# EAGLE board Sequencer-Logic-Prod-V2.1 (EAGLE 9.6.2), part 1 of 2
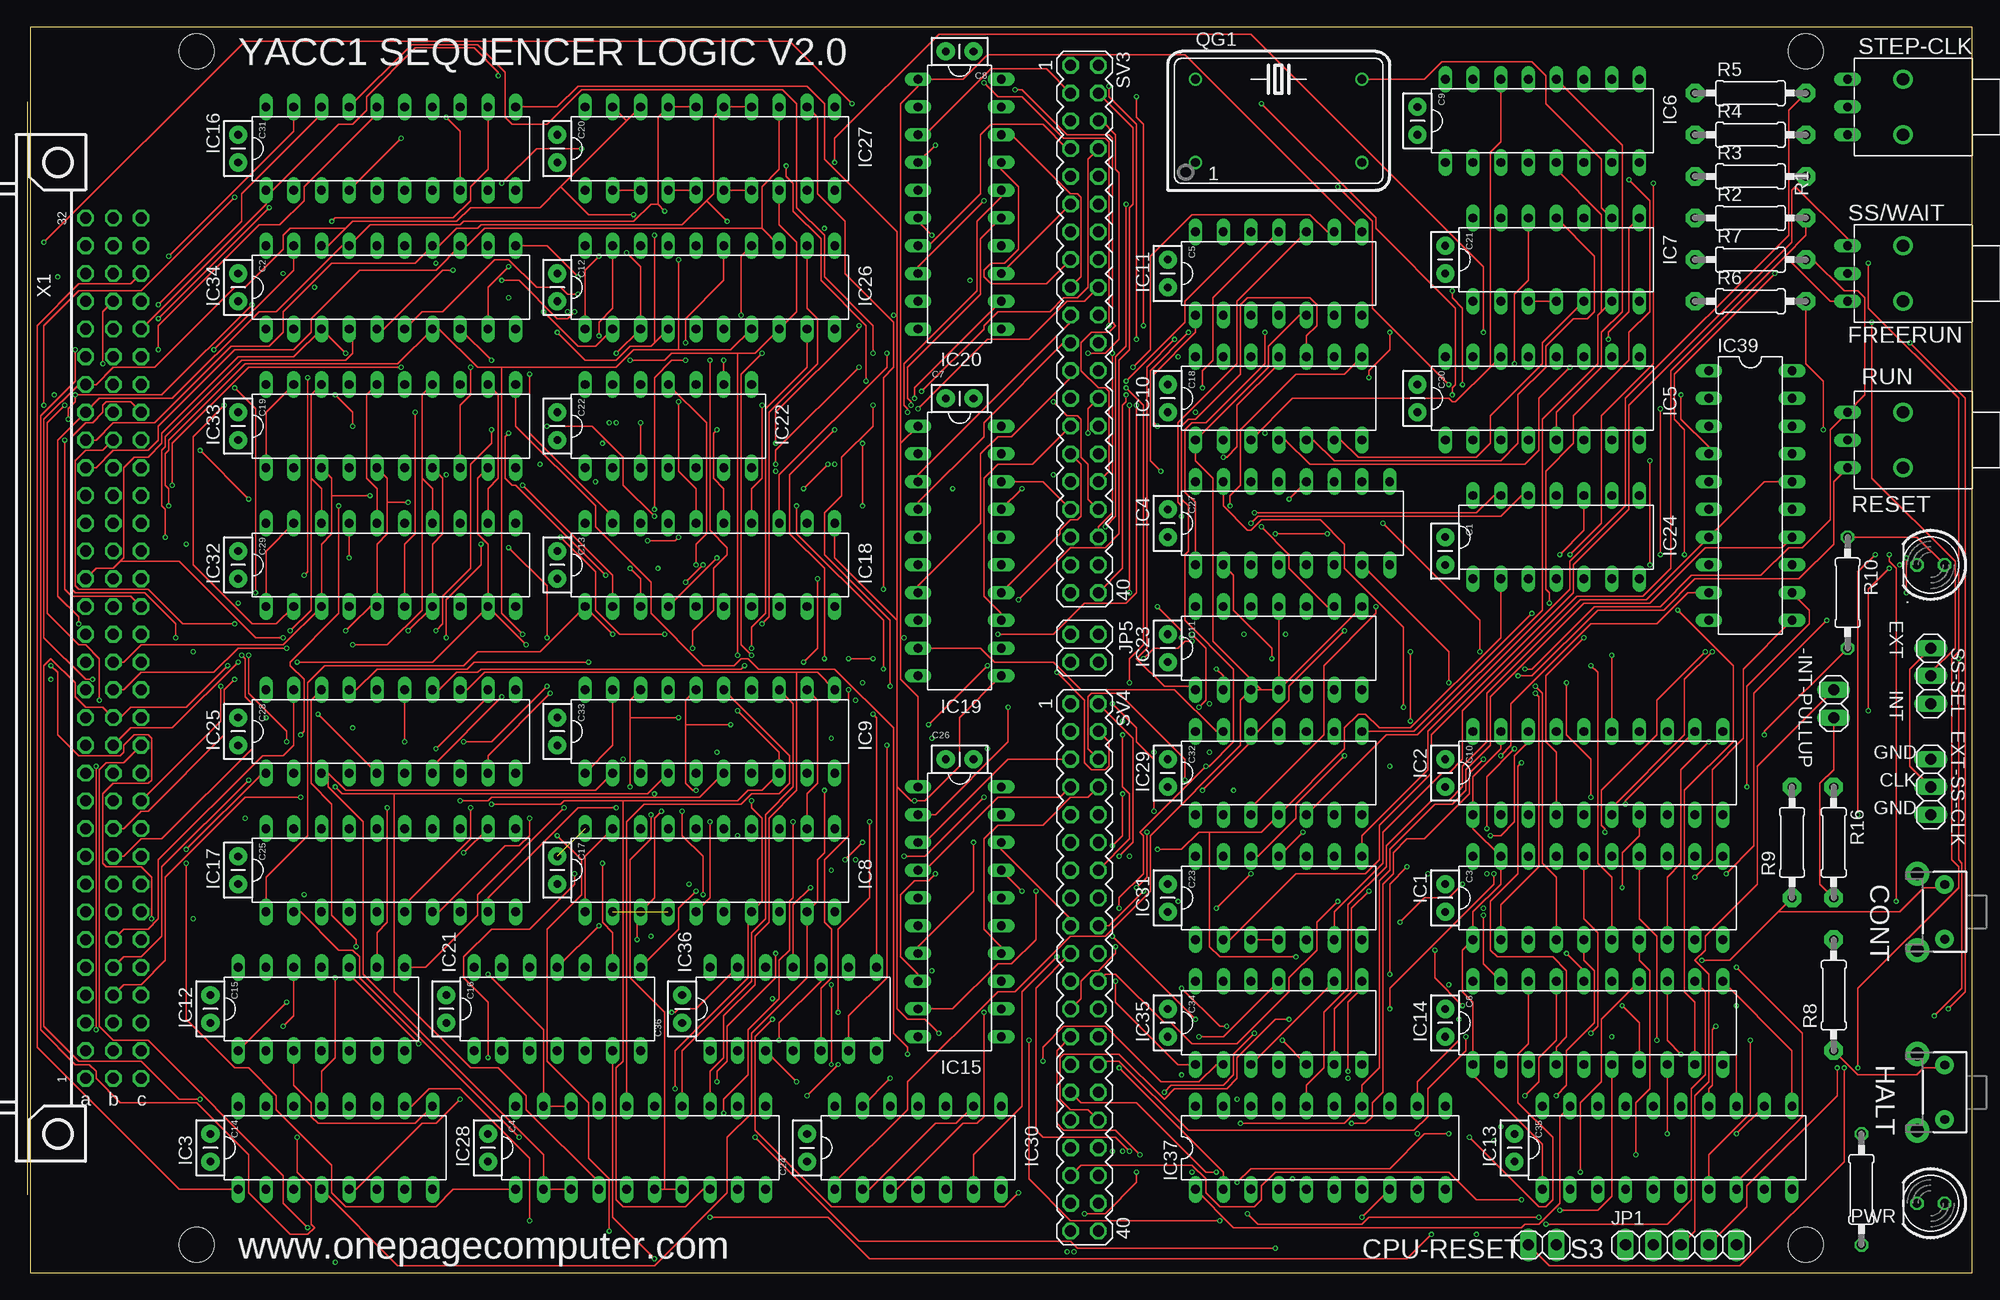
[diagram p0: board, top side]
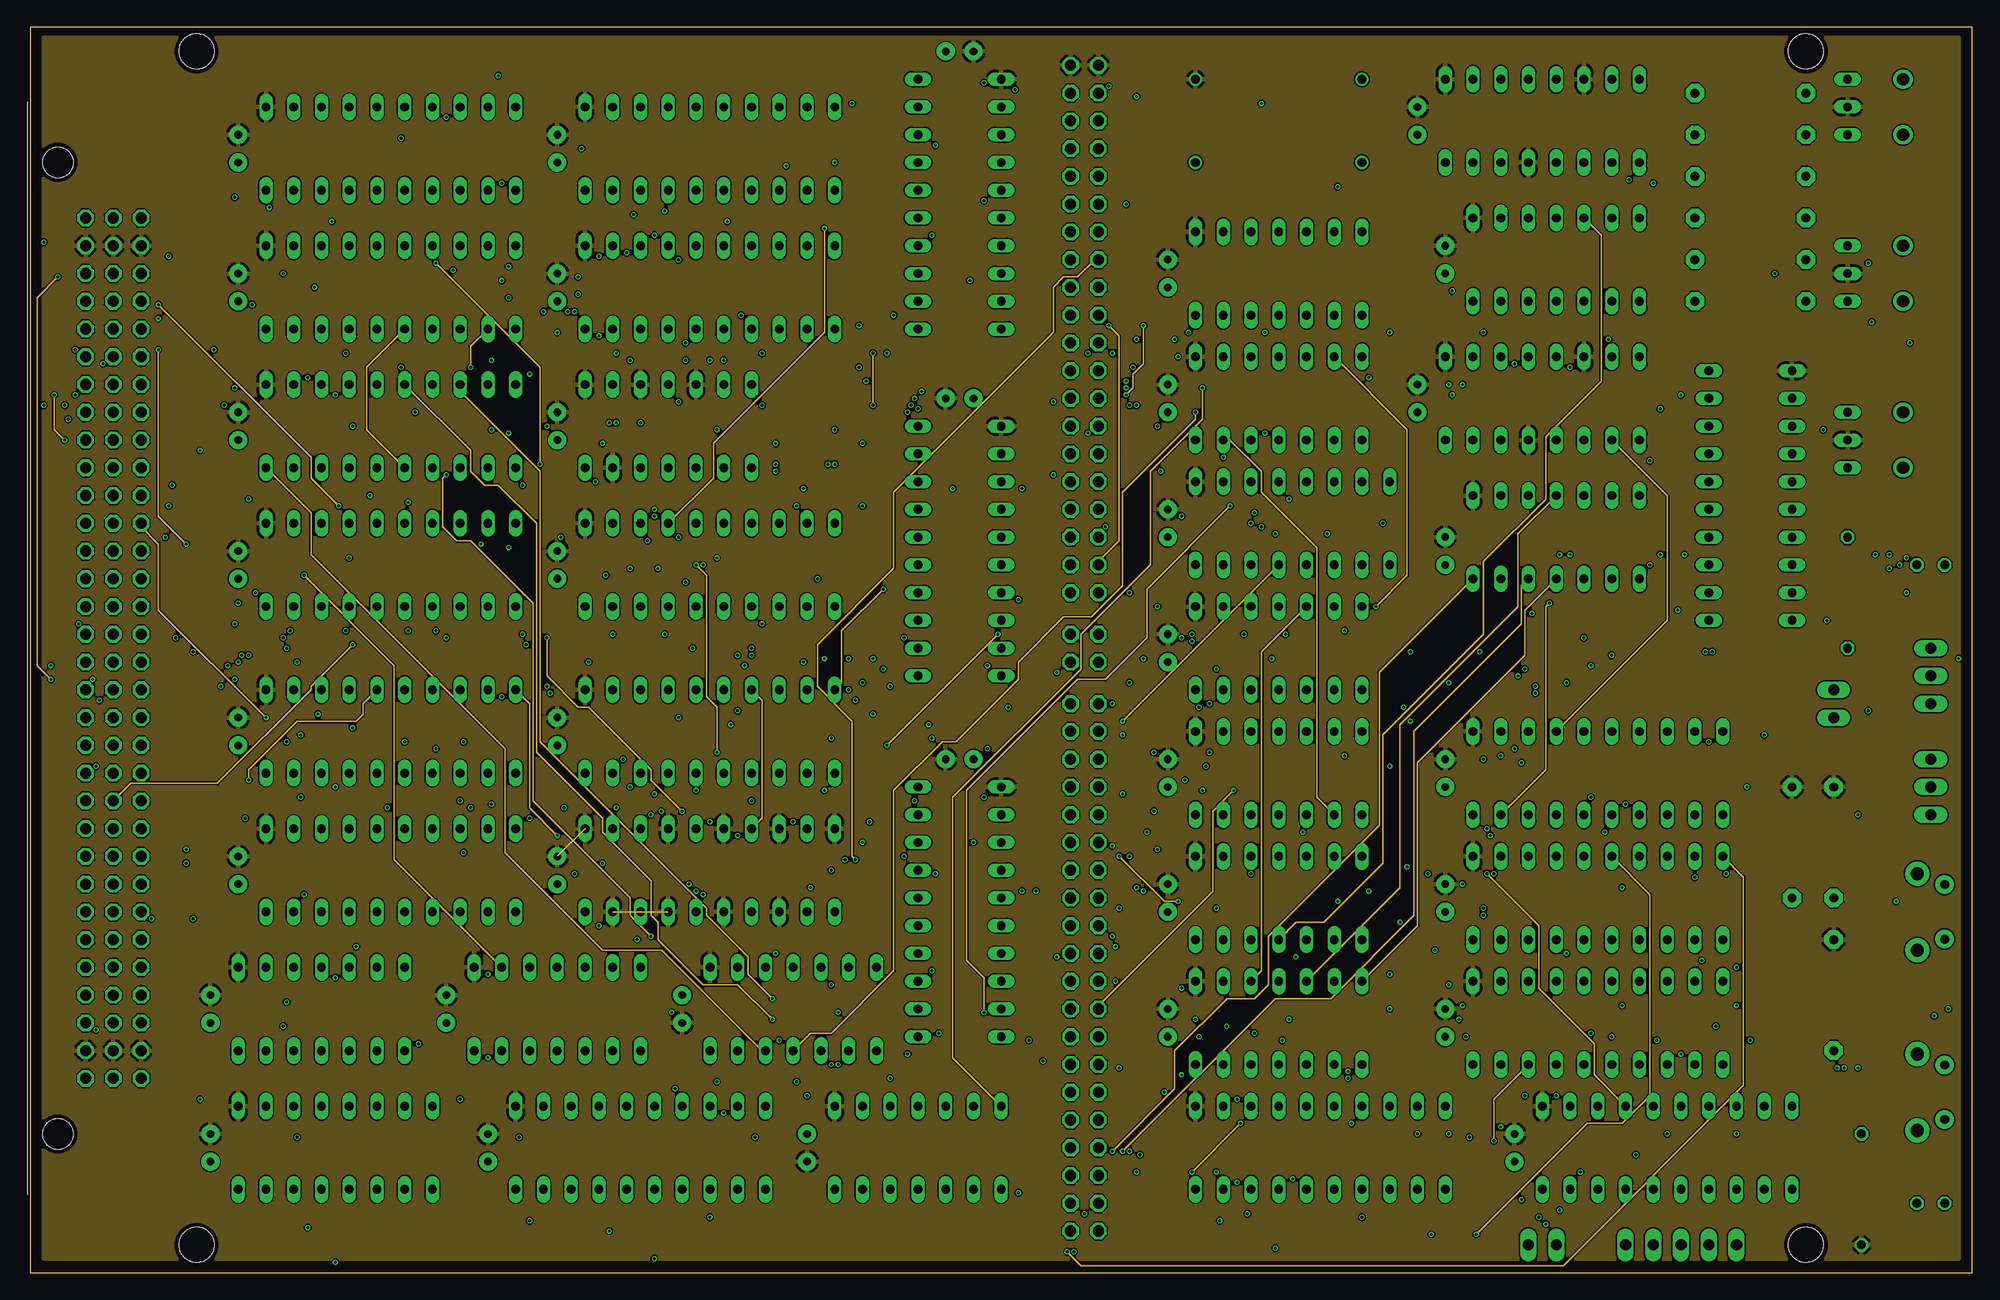
[diagram p1: board, inner layer Route2]
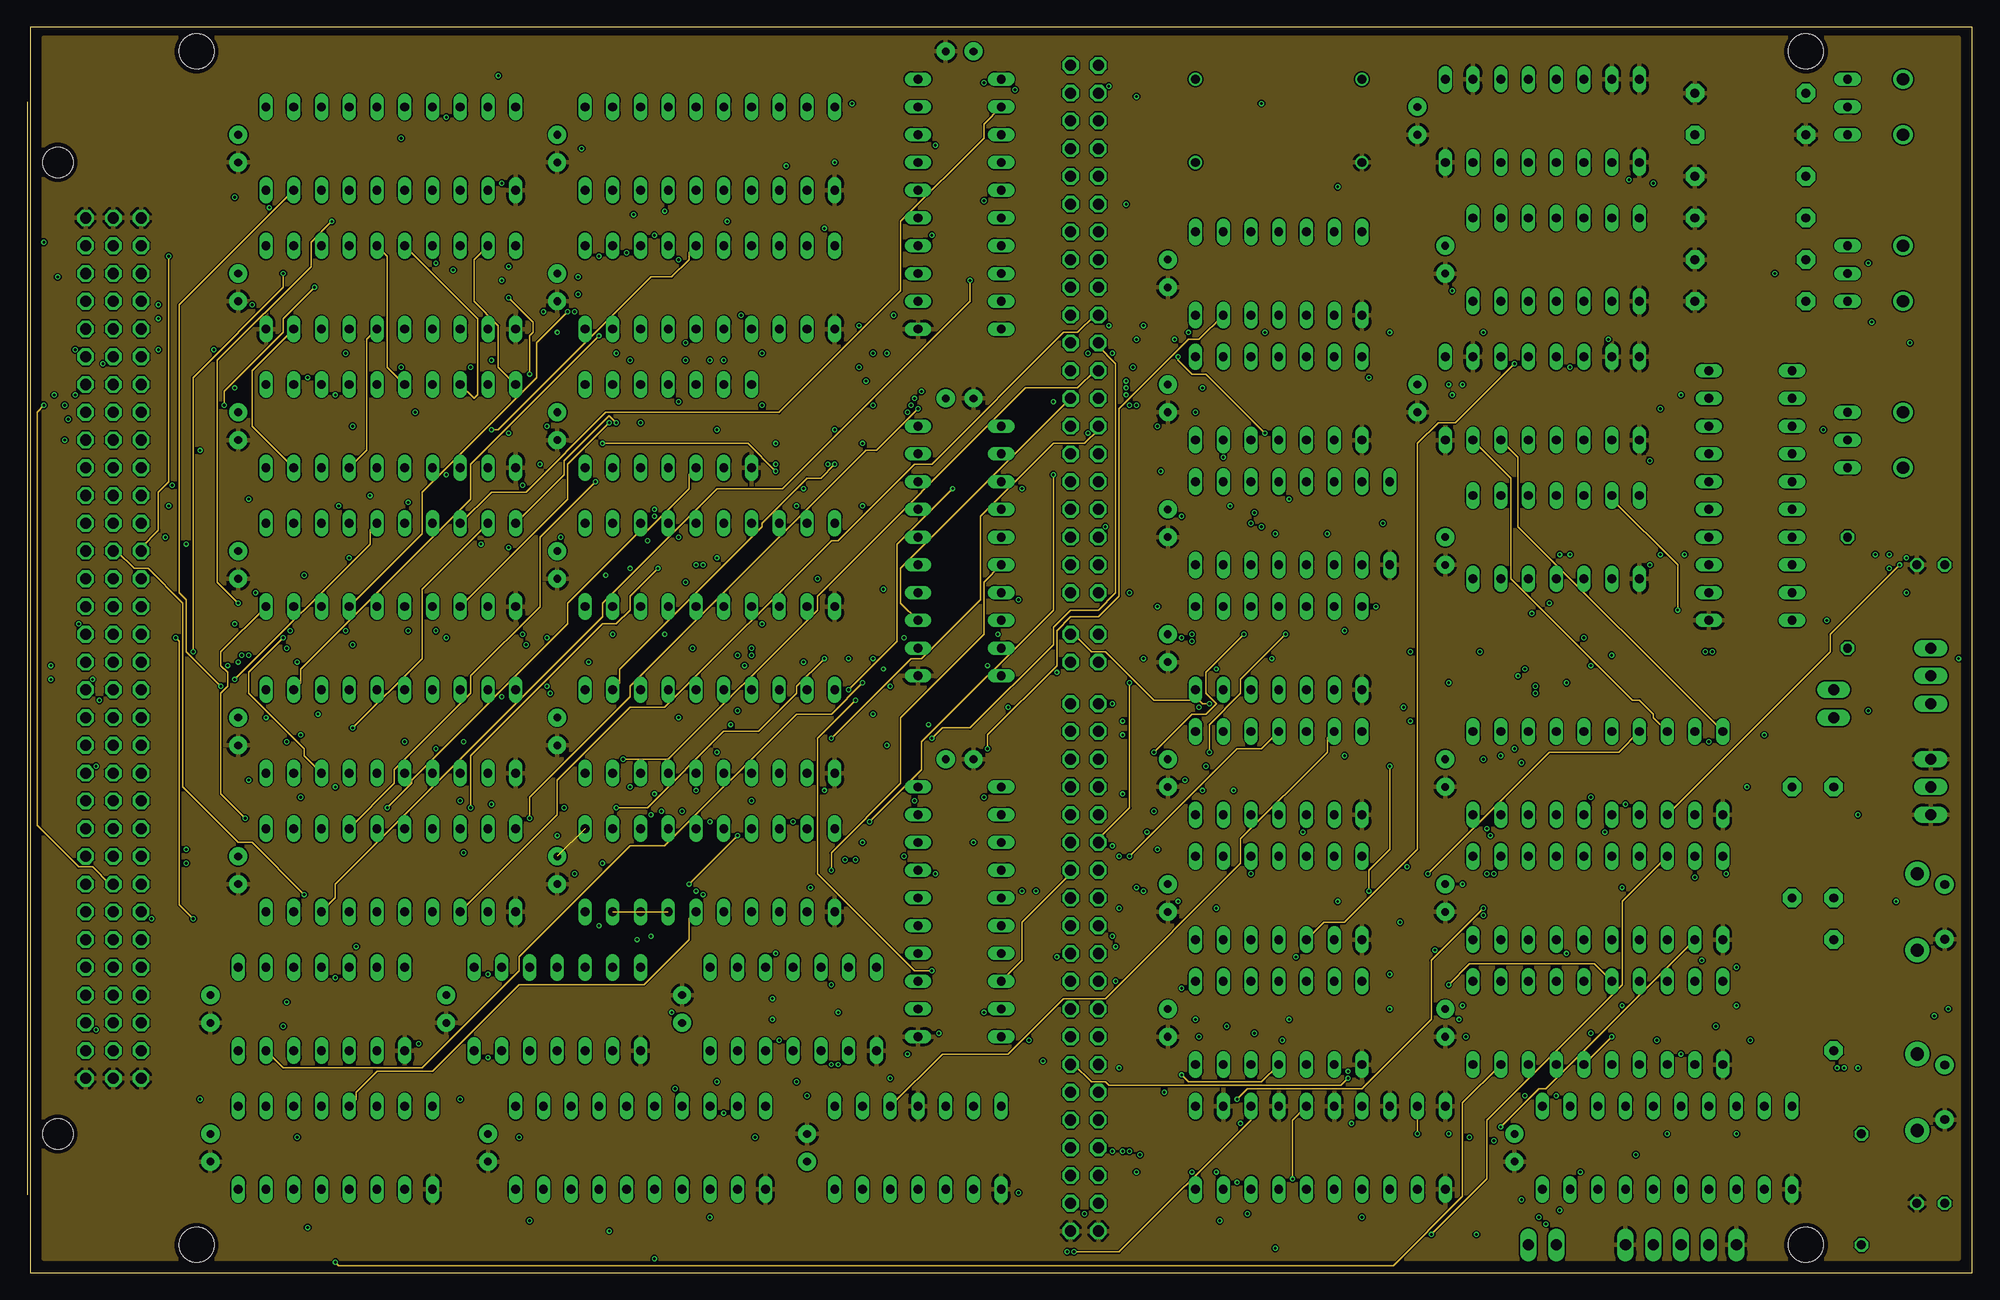
[diagram p2: board, inner layer Route15]
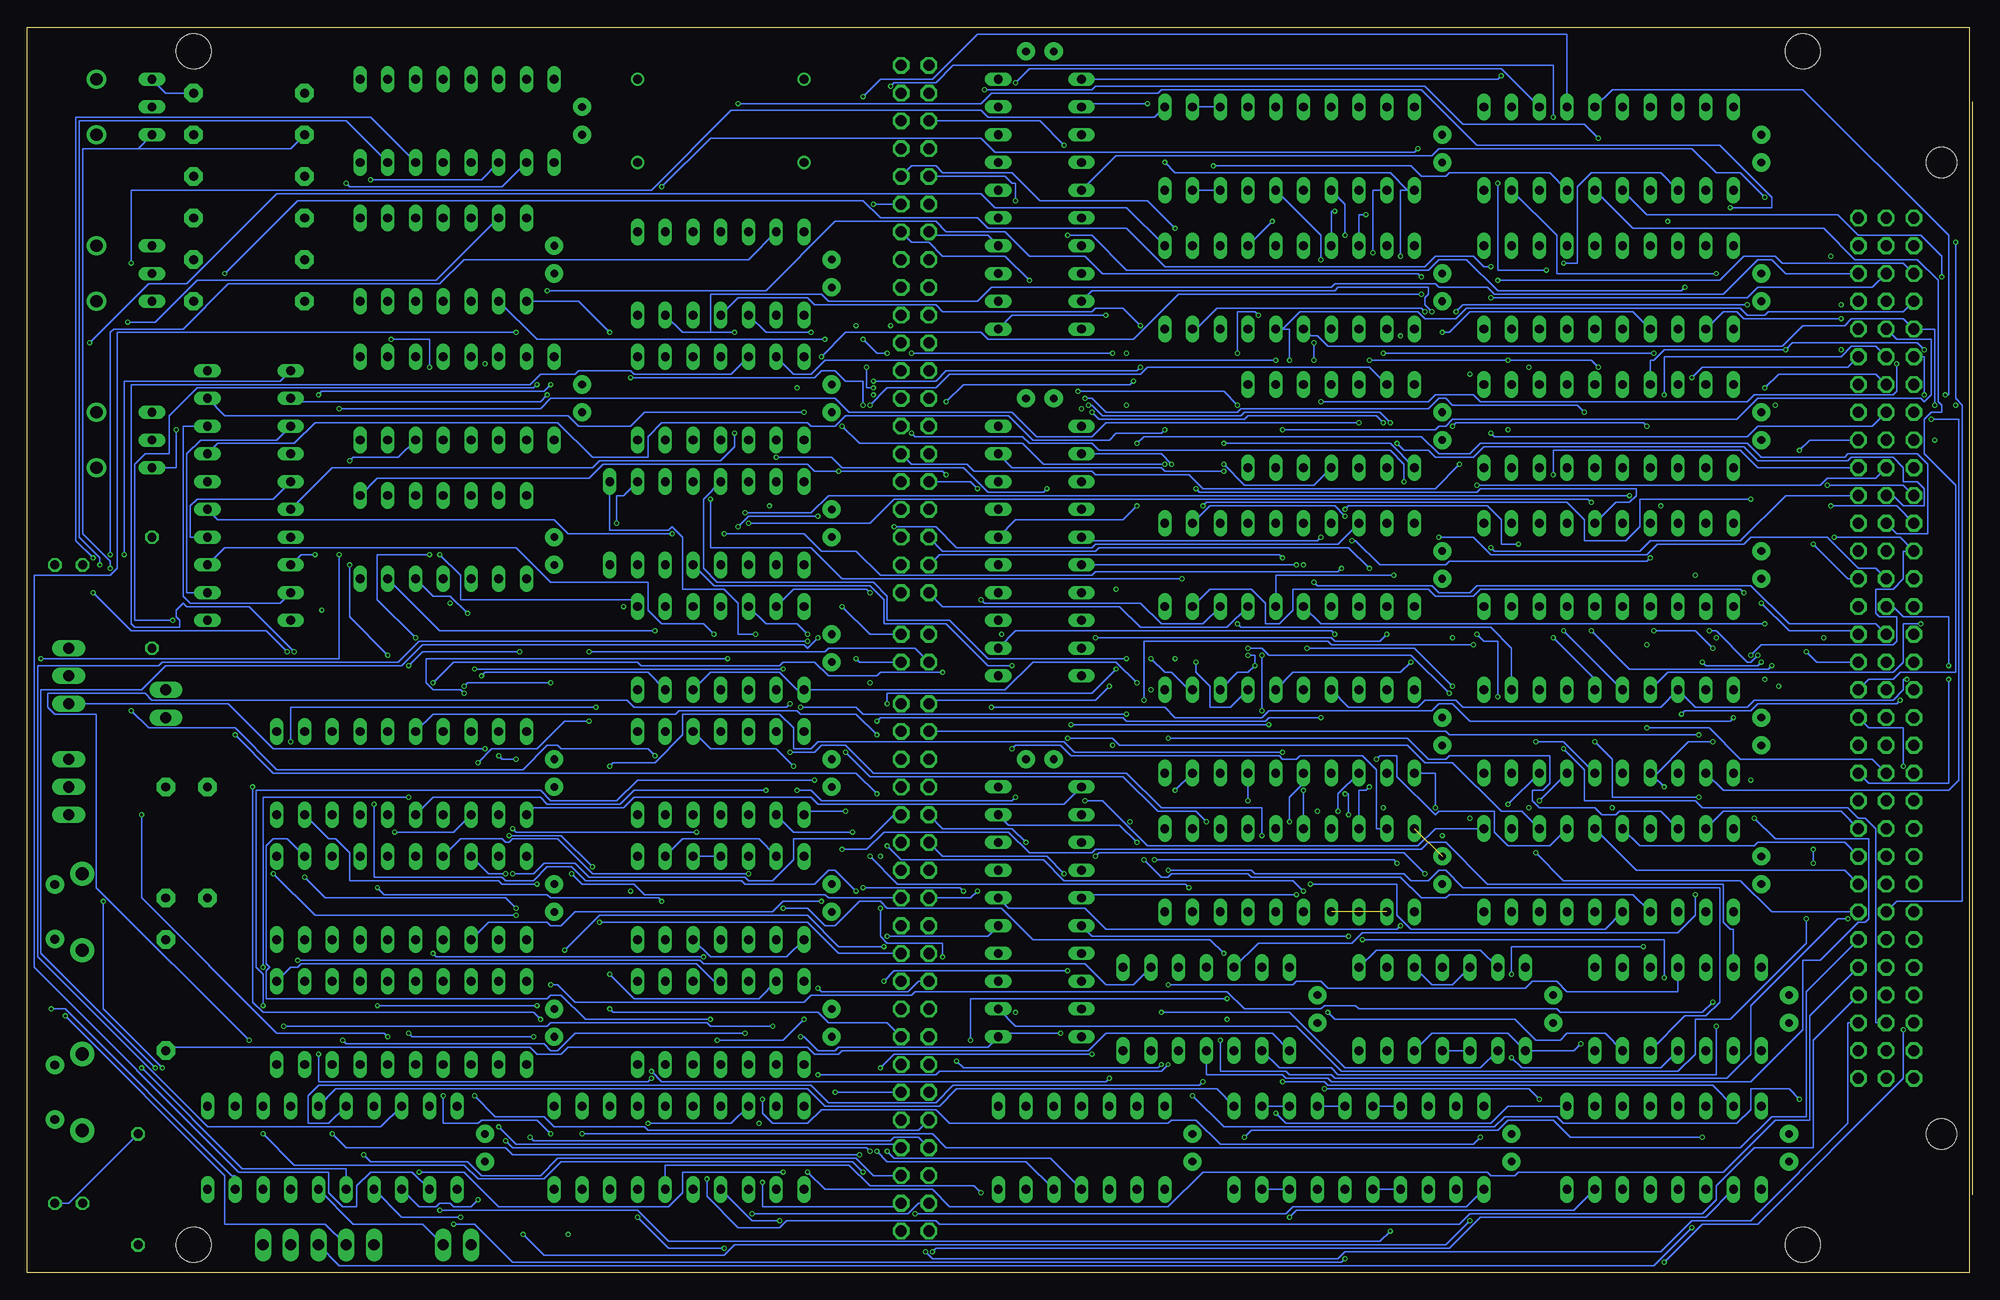
[diagram p3: board, bottom side, seen from below]

Size 177.78 x 113.97 mm. Coordinates in mm from the lower left corner, seen from the top.
Outline: 0,0 177.78,0 177.78,113.97 0,113.97 0,0
Copper layers (1*2*15*16): Top 0.035559375mm / dielectric 0.17018125mm / Route2 0.01778125mm / dielectric 47mil / Route15 0.01778125mm / dielectric 0.17018125mm / Bottom 0.035559375mm
Design rules "oshpark-4layer *": minimum track width 5mil, minimum drill 10mil, track to track 5mil, track to pad 5mil, pad to pad 5mil, via to via 5mil, smd to smd 5mil, copper to edge 15mil, drill to drill 6mil, minimum pad ring 4mil, minimum via ring 4mil, stop-mask expansion 2.5mil, vias tented up to drill 0mil, thermal gap 10mil
Holes 3.2 mm at 15.24,111.76 15.24,2.54 162.56,2.54 162.56,111.76

## Footprints (pad centres in the part's own frame; a part is rotated, then mirrored left to right if it is on the bottom)
1X02 = drill 1.016 long: 1 -1.27,0; 2 1.27,0
LED5MM = drill 0.813 octagon: A -1.27,0; K 1.27,0
CAP-PTH-SMALLEZ = drill 0.7 pad 1.651: 1 0,0; 2 2.54,0
TACTILE-PTH-SIDEEZ = drill 0.8 pad 1.7: 1 -2.5,0; 2 2.5,0 | drill 1.2 pad 2.2: ANCHOR1 -3.5,2.5; ANCHOR2 3.5,2.5
1X03 = drill 1.016 long: 1 -2.54,0; 2 0,0; 3 2.54,0
DIL20 = drill 0.813 long: 1 -11.43,-3.81; 2 -8.89,-3.81; 3 -6.35,-3.81; 4 -3.81,-3.81; 5 -1.27,-3.81; 6 1.27,-3.81; 7 3.81,-3.81; 8 6.35,-3.81; 9 8.89,-3.81; 10 11.43,-3.81; 11 11.43,3.81; 12 8.89,3.81; 13 6.35,3.81; 14 3.81,3.81; 15 1.27,3.81; 16 -1.27,3.81; 17 -3.81,3.81; 18 -6.35,3.81; 19 -8.89,3.81; 20 -11.43,3.81
DIL16 = drill 0.813 long: 1 -8.89,-3.81; 2 -6.35,-3.81; 3 -3.81,-3.81; 4 -1.27,-3.81; 5 1.27,-3.81; 6 3.81,-3.81; 7 6.35,-3.81; 8 8.89,-3.81; 9 8.89,3.81; 10 6.35,3.81; 11 3.81,3.81; 12 1.27,3.81; 13 -1.27,3.81; 14 -3.81,3.81; 15 -6.35,3.81; 16 -8.89,3.81
DIL14 = drill 0.813 long: 1 -7.62,-3.81; 2 -5.08,-3.81; 3 -2.54,-3.81; 4 0,-3.81; 5 2.54,-3.81; 6 5.08,-3.81; 7 7.62,-3.81; 8 7.62,3.81; 9 5.08,3.81; 10 2.54,3.81; 11 0,3.81; 12 -2.54,3.81; 13 -5.08,3.81; 14 -7.62,3.81
1X05 = drill 1.016 long: 1 -5.08,0; 2 -2.54,0; 3 0,0; 4 2.54,0; 5 5.08,0
2X02 = drill 1.016 octagon: 1 -1.27,-1.27; 2 -1.27,1.27; 3 1.27,-1.27; 4 1.27,1.27
DIL14S = drill 0.813: 1 -7.62,-3.81; 7 7.62,-3.81; 8 7.62,3.81; 14 -7.62,3.81
0207/10 = drill 0.813 octagon: 1 -5.08,0; 2 5.08,0
0207/10' = drill 0.813 pad 1.676 octagon: 1 -5.08,0; 2 5.08,0
9070-1W = drill 0.813 long: 1 5.08,-2.54; 2 5.08,0; 3 5.08,2.54 | drill 1.118 pad 1.778: B 0,-2.54; B1 0,2.54
MA20-2 = drill 1.016 octagon: 1 -24.13,-1.27; 2 -24.13,1.27; 3 -21.59,-1.27; 4 -21.59,1.27; 5 -19.05,-1.27; 6 -19.05,1.27; 7 -16.51,-1.27; 8 -16.51,1.27; 9 -13.97,-1.27; 10 -13.97,1.27; 11 -11.43,-1.27; 12 -11.43,1.27; 13 -8.89,-1.27; 14 -8.89,1.27; 15 -6.35,-1.27; 16 -6.35,1.27; 17 -3.81,-1.27; 18 -3.81,1.27; 19 -1.27,-1.27; 20 -1.27,1.27; 21 1.27,-1.27; 22 1.27,1.27; 23 3.81,-1.27; 24 3.81,1.27; 25 6.35,-1.27; 26 6.35,1.27; 27 8.89,-1.27; 28 8.89,1.27; 29 11.43,-1.27; 30 11.43,1.27; 31 13.97,-1.27; 32 13.97,1.27; 33 16.51,-1.27; 34 16.51,1.27; 35 19.05,-1.27; 36 19.05,1.27; 37 21.59,-1.27; 38 21.59,1.27; 39 24.13,-1.27; 40 24.13,1.27
FABC96R = drill 1.016 octagon: A1 -2.54,39.37; A2 -2.54,36.83; A3 -2.54,34.29; A4 -2.54,31.75; A5 -2.54,29.21; A6 -2.54,26.67; A7 -2.54,24.13; A8 -2.54,21.59; A9 -2.54,19.05; A10 -2.54,16.51; A11 -2.54,13.97; A12 -2.54,11.43; A13 -2.54,8.89; A14 -2.54,6.35; A15 -2.54,3.81; A16 -2.54,1.27; A17 -2.54,-1.27; A18 -2.54,-3.81; A19 -2.54,-6.35; A20 -2.54,-8.89; A21 -2.54,-11.43; A22 -2.54,-13.97; A23 -2.54,-16.51; A24 -2.54,-19.05; A25 -2.54,-21.59; A26 -2.54,-24.13; A27 -2.54,-26.67; A28 -2.54,-29.21; A29 -2.54,-31.75; A30 -2.54,-34.29; A31 -2.54,-36.83; A32 -2.54,-39.37; B1 -5.08,39.37; B2 -5.08,36.83; B3 -5.08,34.29; B4 -5.08,31.75; B5 -5.08,29.21; B6 -5.08,26.67; B7 -5.08,24.13; B8 -5.08,21.59; B9 -5.08,19.05; B10 -5.08,16.51; B11 -5.08,13.97; B12 -5.08,11.43; B13 -5.08,8.89; B14 -5.08,6.35; B15 -5.08,3.81; B16 -5.08,1.27; B17 -5.08,-1.27; B18 -5.08,-3.81; B19 -5.08,-6.35; B20 -5.08,-8.89; B21 -5.08,-11.43; B22 -5.08,-13.97; B23 -5.08,-16.51; B24 -5.08,-19.05; B25 -5.08,-21.59; B26 -5.08,-24.13; B27 -5.08,-26.67; B28 -5.08,-29.21; B29 -5.08,-31.75; B30 -5.08,-34.29; B31 -5.08,-36.83; B32 -5.08,-39.37; C1 -7.62,39.37; C2 -7.62,36.83; C3 -7.62,34.29; C4 -7.62,31.75; C5 -7.62,29.21; C6 -7.62,26.67; C7 -7.62,24.13; C8 -7.62,21.59; C9 -7.62,19.05; C10 -7.62,16.51; C11 -7.62,13.97; C12 -7.62,11.43; C13 -7.62,8.89; C14 -7.62,6.35; C15 -7.62,3.81; C16 -7.62,1.27; C17 -7.62,-1.27; C18 -7.62,-3.81; C19 -7.62,-6.35; C20 -7.62,-8.89; C21 -7.62,-11.43; C22 -7.62,-13.97; C23 -7.62,-16.51; C24 -7.62,-19.05; C25 -7.62,-21.59; C26 -7.62,-24.13; C27 -7.62,-26.67; C28 -7.62,-29.21; C29 -7.62,-31.75; C30 -7.62,-34.29; C31 -7.62,-36.83; C32 -7.62,-39.37 | hole 2.794: 0,-44.456; 0,44.456

## Placement (x,y rotation side)
-INT-PULLUP  [1X02]  165.1,52.07 90 top
.  OUT  [LED5MM]  173.99,64.77 180 top
C1  .1  [CAP-PTH-SMALLEZ]  129.54,67.31 270 top
C2  .1  [CAP-PTH-SMALLEZ]  19.05,91.44 270 top
C3  .1  [CAP-PTH-SMALLEZ]  129.54,35.56 270 top
C4  .1  [CAP-PTH-SMALLEZ]  41.91,12.7 270 top
C5  .1  [CAP-PTH-SMALLEZ]  104.14,92.71 270 top
C6  .1  [CAP-PTH-SMALLEZ]  129.54,24.13 270 top
C7  .1  [CAP-PTH-SMALLEZ]  83.82,80.01 0 top
C8  .1  [CAP-PTH-SMALLEZ]  86.36,111.76 180 top
C9  .1  [CAP-PTH-SMALLEZ]  127,106.68 270 top
C10  .1  [CAP-PTH-SMALLEZ]  129.54,46.99 270 top
C11  .1  [CAP-PTH-SMALLEZ]  104.14,58.42 270 top
C12  .1  [CAP-PTH-SMALLEZ]  48.26,91.44 270 top
C13  .1  [CAP-PTH-SMALLEZ]  48.26,66.04 270 top
C14  .1  [CAP-PTH-SMALLEZ]  16.51,12.7 270 top
C15  .1  [CAP-PTH-SMALLEZ]  16.51,25.4 270 top
C16  .1  [CAP-PTH-SMALLEZ]  38.1,25.4 270 top
C17  .1  [CAP-PTH-SMALLEZ]  48.26,38.1 270 top
C18  .1  [CAP-PTH-SMALLEZ]  104.14,81.28 270 top
C19  .1  [CAP-PTH-SMALLEZ]  19.05,78.74 270 top
C20  .1  [CAP-PTH-SMALLEZ]  48.26,104.14 270 top
C21  .1  [CAP-PTH-SMALLEZ]  129.54,93.98 270 top
C22  .1  [CAP-PTH-SMALLEZ]  48.26,78.74 270 top
C23  .1  [CAP-PTH-SMALLEZ]  104.14,35.56 270 top
C24  .1  [CAP-PTH-SMALLEZ]  71.12,10.16 90 top
C25  .1  [CAP-PTH-SMALLEZ]  19.05,38.1 270 top
C26  .1  [CAP-PTH-SMALLEZ]  83.82,46.99 0 top
C27  .1  [CAP-PTH-SMALLEZ]  104.14,69.85 270 top
C28  .1  [CAP-PTH-SMALLEZ]  19.05,50.8 270 top
C29  .1  [CAP-PTH-SMALLEZ]  19.05,66.04 270 top
C30  .1  [CAP-PTH-SMALLEZ]  127,81.28 270 top
C31  .1  [CAP-PTH-SMALLEZ]  19.05,104.14 270 top
C32  .1  [CAP-PTH-SMALLEZ]  104.14,46.99 270 top
C33  .1  [CAP-PTH-SMALLEZ]  48.26,50.8 270 top
C34  .1  [CAP-PTH-SMALLEZ]  104.14,24.13 270 top
C35  .1  [CAP-PTH-SMALLEZ]  135.89,12.7 270 top
C36  .1  [CAP-PTH-SMALLEZ]  59.69,22.86 90 top
CONT  SWITCH-MOMENTARY-2SIDE_EZ  [TACTILE-PTH-SIDEEZ]  175.26,33.02 90 top
EXT-SS-CLK  [1X03]  173.99,44.45 270 top
HALT  SWITCH-MOMENTARY-2SIDE_EZ  [TACTILE-PTH-SIDEEZ]  175.26,16.51 90 top
IC1  74LS244N  [DIL20]  143.51,34.29 0 top
IC2  74LS244N  [DIL20]  143.51,45.72 0 top
IC3  74LS175N  [DIL16]  27.94,11.43 0 top
IC4  74LS175N  [DIL16]  115.57,68.58 0 top
IC5  74LS192N  [DIL16]  138.43,80.01 0 top
IC6  74LS192N  [DIL16]  138.43,105.41 0 top
IC7  74LS08N  [DIL14]  139.7,92.71 0 top
IC8  74LS244N  [DIL20]  62.23,36.83 0 top
IC9  74LS244N  [DIL20]  62.23,49.53 0 top
IC10  74LS32N  [DIL14]  114.3,80.01 0 top
IC11  74LS04N  [DIL14]  114.3,91.44 0 top
IC12  74LS08N  [DIL14]  26.67,24.13 0 top
IC13  74LS374N  [DIL20]  149.86,11.43 0 top
IC14  74LS374N  [DIL20]  143.51,22.86 0 top
IC15  74LS374N  [DIL20]  85.09,33.02 270 top
IC16  74LS374N  [DIL20]  33.02,102.87 0 top
IC17  74LS374N  [DIL20]  33.02,36.83 0 top
IC18  74LS374N  [DIL20]  62.23,64.77 0 top
IC19  74LS374N  [DIL20]  85.09,66.04 270 top
IC20  74LS374N  [DIL20]  85.09,97.79 270 top
IC21  74ALS02N  [DIL14]  48.26,24.13 0 top
IC22  74LS74N  [DIL14]  58.42,77.47 0 top
IC23  74ALS02N  [DIL14]  114.3,57.15 0 top
IC24  74LS32N  [DIL14]  139.7,67.31 0 top
IC25  74LS374N  [DIL20]  33.02,49.53 0 top
IC26  74LS374N  [DIL20]  62.23,90.17 0 top
IC27  74LS374N  [DIL20]  62.23,102.87 0 top
IC28  74LS374N  [DIL20]  55.88,11.43 0 top
IC29  74LS08N  [DIL14]  114.3,45.72 0 top
IC30  74LS04N  [DIL14]  81.28,11.43 0 top
IC31  74ALS02N  [DIL14]  114.3,34.29 0 top
IC32  74LS244N  [DIL20]  33.02,64.77 0 top
IC33  74LS244N  [DIL20]  33.02,77.47 0 top
IC34  74LS374N  [DIL20]  33.02,90.17 0 top
IC35  74LS32N  [DIL14]  114.3,22.86 0 top
IC36  74LS04N  [DIL14]  69.85,24.13 0 top
IC37  74LS244N  [DIL20]  118.11,11.43 0 top
IC39  74LS244N  [DIL20]  157.48,71.12 270 top
JP1  [1X05]  151.13,2.54 0 top
JP2  PINHD-1X2  [1X02]  138.43,2.54 0 top
JP5  [2X02]  96.52,57.15 270 top
PWR  [LED5MM]  173.99,6.35 180 top
QG1  [DIL14S]  114.3,105.41 0 top
R1  330  [0207/10]  167.64,7.62 270 top
R2  10k  [0207/10']  157.48,96.52 180 top
R3  10k  [0207/10']  157.48,100.33 0 top
R4  10k  [0207/10']  157.48,104.14 0 top
R5  10k  [0207/10']  157.48,107.95 0 top
R6  10k  [0207/10']  157.48,88.9 180 top
R7  10k  [0207/10']  157.48,92.71 0 top
R8  10k  [0207/10']  165.1,25.4 90 top
R9  10k  [0207/10']  161.29,39.37 90 top
R10  330  [0207/10]  166.37,62.23 270 top
R16  10k  [0207/10']  165.1,39.37 270 top
RESET  [9070-1W]  171.45,76.2 180 top
SS-SEL  [1X03]  173.99,54.61 90 top
SS/WAIT  [9070-1W]  171.45,91.44 180 top
STEP-CLK  [9070-1W]  171.45,106.68 180 top
SV3  [MA20-2]  96.52,86.36 270 top
SV4  [MA20-2]  96.52,27.94 270 top
X1  FABC96R  [FABC96R]  2.54,57.15 180 top

## Library data of the parts
-INT-PULLUP EXT-SS-CLK JP1 JP5 SS-SEL = pinhead
. PWR = led
C1-C36 = SparkFun-Capacitors
CONT HALT = SparkFun-Electromechanical
IC1-IC37 IC39 = 74xx-us
JP2 = Connector; CATEGORY: CONNECTOR; SUB-CATEGORY: PIN-HEADER
QG1 = crystal; OC_FARNELL: unknown; OC_NEWARK: unknown
R1 R10 = eagle-ltspice; SPICEMODEL: NONE; SPICEPREFIX: R
R2-R9 R16 = adafruit
RESET SS/WAIT STEP-CLK = switch
SV3 SV4 = con-lstb; OC_FARNELL: unknown; OC_NEWARK: unknown
X1 = con-vg

## Nets
-2-BYTE-OPERAND-SEL: IC13.16 IC33.1 IC33.19 IC36.3
-AC-LD: IC15.5 X1.C22
-AC-LD-INV: IC16.19 X1.C20
-AC-RD: IC15.2 X1.C21
-ALU-FUNC: IC16.6 X1.C15
-BRANCH-RD: IC13.2 IC26.1 IC27.1
-BUS-EN: IC1.1 IC1.19 IC2.1 IC2.19 IC11.8 IC13.1 IC14.1 IC15.1 IC16.1 IC17.1 IC18.1 IC19.1 IC20.1 X1.C28
-DO-INT: IC8.1 IC8.19 IC11.2
-FP-HALT: HALT.2 IC36.1 R8.1
-HALT-CONT: CONT.2 IC36.9 R9.1
-HL-SWAP: IC15.12 X1.C25
-INT: -INT-PULLUP.2 JP1.3 X1.C13
-INT-JMP: IC13.12 IC25.1 IC28.1
-INTA: IC14.2 X1.C14
-IO-ADDR-LD: IC16.2 X1.C11
-IO-RD: IC18.6 X1.B25
-IO-WR: IC18.9 X1.B26
-MEM-CPU-RESET: JP2.1 JP5.2
-MEM-RD: IC18.2 X1.B23
-MEM-WR: IC18.5 X1.B24
-ONE-OPERAND-SEL: IC32.1 IC32.19 IC36.4 IC39.19
-REG-DN: IC19.16 X1.B21
-REG-FUNC-LD: IC20.5 X1.B8
-REG-FUNC-RD: IC20.2 X1.B7
-REG-LD-HI: IC36.12 X1.B20
-REG-LD-LO: IC36.10 X1.B18
-REG-RD-HI: IC19.12 X1.B19
-REG-RD-LO: IC19.6 X1.B17
-REG-UP: IC19.19 X1.B22
-RESET: IC3.1 IC4.1 IC11.6 X1.C30
-RUN: X1.C29
-SR-LD: IC15.6 X1.C23
-TMP-REG-LD0: IC18.15 X1.B28
-TMP-REG-LD1: IC18.19 X1.B30
-TMP-REG-RD0: IC18.12 X1.B27
-TMP-REG-RD1: IC18.16 X1.B29
-VMA: IC16.5 X1.C12
ADDR0: X1.A3
ADDR1: X1.A4
ADDR2: X1.A5
ADDR3: X1.A6
ADDR4: X1.A7
ADDR5: X1.A8
ADDR6: X1.A9
ADDR7: X1.A10
ADDR8: X1.A11
ADDR9: X1.A12
ADDR10: X1.A13
ADDR11: X1.A14
ADDR12: X1.A15
ADDR13: X1.A16
ADDR14: X1.A17
ADDR15: X1.A18
ADDR-REG-ID0: IC37.18 IC39.9 IC39.18 X1.C3
ADDR-REG-ID1: IC37.16 IC39.7 IC39.16 X1.C4
ADDR-REG-ID2: IC37.14 IC39.5 IC39.14 X1.C5
ADDR-REG-ID3: IC37.12 IC39.3 IC39.12 X1.C6
ALU0: IC16.9 X1.C16
ALU1: IC16.12 X1.C17
ALU2: IC16.15 X1.C18
ALU3: IC16.16 X1.C19
BR-COND: IC29.1 X1.C24
BR-TEST: IC15.9 IC29.2
BRANCH-LD-HI: IC13.9 IC26.11
BRANCH-LD-LO: IC13.5 IC27.11
BUS-LATCH-CLK: IC13.11 IC14.11 IC15.11 IC16.11 IC17.11 IC18.11 IC19.11 IC20.11 IC35.11
CADDR0: IC2.16 SV4.14
CADDR1: IC2.14 SV4.16
CADDR2: IC2.12 SV4.18
CADDR3: IC2.9 SV4.20
CADDR4: IC2.7 SV4.22
CADDR5: IC2.5 SV4.24
CADDR6: IC1.18 SV4.26
CADDR7: IC1.16 SV4.28
CADDR8: IC1.14 SV4.30
CADDR9: IC1.12 SV4.32
CADDR10: IC1.9 SV4.34
CADDR11: IC1.7 SV4.36
CADDR12: IC1.5 SV4.38
CADDR13: IC1.3 SV4.2
CNT-CLK: IC2.18 IC35.13
COUNT-FAULT: IC2.3 IC10.12
COUNT-RESET: IC5.14 IC6.14 IC10.3
DATA0: IC9.2 IC25.3 IC26.3 IC27.2 IC27.3 IC28.2 IC28.3 IC34.3 X1.A19
DATA1: IC9.4 IC25.4 IC26.4 IC27.4 IC27.5 IC28.4 IC28.5 IC34.4 X1.A20
DATA2: IC9.6 IC25.7 IC26.7 IC27.6 IC27.7 IC28.6 IC28.7 IC34.7 X1.A21
DATA3: IC9.8 IC25.8 IC26.8 IC27.8 IC27.9 IC28.8 IC28.9 IC34.8 X1.A22
DATA4: IC9.11 IC25.13 IC26.13 IC27.12 IC27.13 IC28.12 IC28.13 IC34.13 X1.A23
DATA5: IC9.13 IC25.14 IC26.14 IC27.14 IC27.15 IC28.14 IC28.15 IC34.14 X1.A24
DATA6: IC9.15 IC25.17 IC26.17 IC27.16 IC27.17 IC28.16 IC28.17 IC34.17 X1.A25
DATA7: IC9.17 IC25.18 IC26.18 IC27.18 IC27.19 IC28.18 IC28.19 IC34.18 X1.A26
DATA8: IC25.2 IC26.2 X1.A27
DATA9: IC25.5 IC26.5 X1.A28
DATA10: IC25.6 IC26.6 X1.A29
DATA11: IC25.9 IC26.9 X1.A30
DATA12: IC25.12 IC26.12 X1.B3
DATA13: IC25.15 IC26.15 X1.B4
DATA14: IC25.16 IC26.16 X1.B5
DATA15: IC25.19 IC26.19 X1.B6
DEST-ADDR: IC13.19 IC37.1
DO-HALT: IC10.13 IC22.9
DO-INT: IC9.1 IC9.19 IC11.1 IC12.8
EXTERNAL-SINGLESTEP-CLK: EXT-SS-CLK.2 SS-SEL.3
FP-CLKH: IC31.12 R4.1 STEP-CLK.3
FP-CLKL: IC31.8 R5.2 STEP-CLK.1
FP-EXECUTE: IC23.6 R6.1 RESET.3
FP-FREERUN: IC31.2 R3.2 SS/WAIT.1
FP-HALT: IC12.12 IC36.2
FP-HALT-CONT: IC23.12 IC36.8
FP-RESET: IC23.2 R7.2 RESET.1
FP-SINGLE-STEP-CLK: IC31.10 IC31.11 SS-SEL.1
FP-SS: IC31.6 R2.1 SS/WAIT.3
FREE-RUN: IC7.10 IC31.3 IC31.4
GND: ..K C1.2 C2.2 C3.2 C4.2 C5.2 C6.2 C7.2 C8.2 C9.2 C10.2 C11.2 C12.2 C13.2 C14.2 C15.2 C16.2 C17.2 C18.2 C19.2 C20.2 C21.2 C22.2 C23.2 C24.2 C25.2 C26.2 C27.2 C28.2 C29.2 C30.2 C31.2 C32.2 C33.2 C34.2 C35.2 C36.2 CONT.1 EXT-SS-CLK.1 EXT-SS-CLK.3 HALT.1 IC1.10 IC2.10 IC3.8 IC4.8 IC5.1 IC5.8 IC5.9 IC5.10 IC5.15 IC6.1 IC6.8 IC6.9 IC6.10 IC6.15 IC7.7 IC8.10 IC9.10 IC10.7 IC11.7 IC12.7 IC13.10 IC14.10 IC15.10 IC16.10 IC17.10 IC18.10 IC19.10 IC20.10 IC21.7 IC22.7 IC23.7 IC24.7 IC25.10 IC26.10 IC27.10 IC28.10 IC29.7 IC30.7 IC30.11 IC31.7 IC32.10 IC33.10 IC34.1 IC34.10 IC35.7 IC36.7 IC37.10 IC37.11 IC37.13 IC37.15 IC37.17 IC37.19 IC39.10 JP1.1 JP1.5 PWR.K QG1.7 R2.2 R3.1 R4.2 R5.1 R6.2 R7.1 SV4.39 SV4.40 X1.A1 X1.A32 X1.B1 X1.B32 X1.C1 X1.C32
HALT-CLR: IC22.13 IC23.13
HARD-RESET1: IC31.9 IC31.13
IN: X1.C26
INT-EDGE: IC22.3 JP1.2
INT-EN: IC14.12 IC21.6
INT-LD-HI: IC14.6 IC25.11
INT-LD-LO: IC13.15 IC28.11
INT-START: IC14.9 IC24.9
IO-ADDR0: IC17.12 X1.C7
IO-ADDR1: IC17.15 X1.C8
IO-ADDR2: IC17.16 X1.C9
IO-ADDR3: IC17.19 X1.C10
LADDR-REG-ID0: IC17.2 IC39.11
LADDR-REG-ID1: IC17.5 IC39.13
LADDR-REG-ID2: IC17.6 IC39.15
LADDR-REG-ID3: IC17.9 IC39.17
LD-INS-REG: IC12.1 IC14.15
LD-INS-REG1: IC3.9 IC4.9 IC12.3
LREG-LD-HI: IC12.5 IC19.15
LREG-LD-ID0: IC20.16 IC32.11
LREG-LD-ID1: IC20.19 IC32.13
LREG-LD-ID2: IC19.2 IC32.15
LREG-LD-ID3: IC19.5 IC32.17
LREG-LD-LO: IC19.9 IC29.13
LREG-RD-ID0: IC20.6 IC32.2
LREG-RD-ID1: IC20.9 IC32.4
LREG-RD-ID2: IC20.12 IC32.6
LREG-RD-ID3: IC20.15 IC32.8
N$1: IC5.5 IC6.12
N$2: IC1.2 IC4.2
N$3: IC1.4 IC4.7
N$4: IC6.5 IC7.6 IC29.5
N$5: IC4.4 IC8.18 IC9.18
N$6: IC4.5 IC8.16 IC9.16
N$7: IC2.2 IC6.3
N$8: IC2.4 IC6.2
N$9: IC2.6 IC6.6
N$10: IC1.6 IC4.10
N$11: IC2.8 IC6.7
N$12: IC2.11 IC5.3
N$13: IC2.13 IC5.2
N$14: IC2.15 IC5.6
N$15: IC2.17 IC5.7
N$16: IC7.1 IC36.6
N$17: IC4.12 IC8.14 IC9.14
N$18: IC4.13 IC8.12 IC9.12
N$19: IC3.4 IC8.9 IC9.9
N$20: IC3.5 IC8.7 IC9.7
N$21: IC3.12 IC8.5 IC9.5
N$22: IC3.13 IC8.3 IC9.3
N$23: IC1.8 IC4.15
N$24: IC12.10 IC21.1 IC21.5
N$25: IC21.3 IC21.4
N$26: IC10.11 IC36.5
N$27: IC11.3 IC21.2 IC24.8
N$28: IC12.9 IC22.5
N$29: IC11.4 IC22.1
N$30: PWR.A R1.1
N$31: IC7.3 IC7.4
N$32: IC23.10 IC35.12
N$33: IC22.11 IC35.6
N$34: IC1.11 IC3.2
N$35: IC1.13 IC3.7
N$36: IC1.15 IC3.10
N$37: IC1.17 IC3.15
N$38: IC7.11 IC10.5
N$39: IC7.8 IC10.4
N$40: IC7.9 QG1.8
N$41: IC11.12 IC22.4
N$42: IC11.11 IC30.8
N$43: IC11.13 JP1.4
N$44: IC30.2 IC30.9
N$45: IC35.3 IC35.9
N$46: IC11.10 IC23.9
N$47: IC24.11 IC35.10
N$48: IC21.10 IC21.12
N$49: -INT-PULLUP.1 R16.2
N$51: IC29.9 IC30.12
N$52: IC24.5 IC29.8
N$53: IC12.4 IC24.6 IC29.12
N$54: IC12.11 IC35.4
N$55: IC10.2 IC29.6
N$56: IC24.4 IC30.13 IC35.8
N$57: IC29.11 IC36.11
N$58: IC12.6 IC36.13
N$59: ..A R10.1
N$60: IC10.8 IC30.3
N$61: IC33.17 IC34.19 IC37.8
N$62: IC33.2 IC34.2 IC39.2
N$63: IC33.4 IC34.5 IC39.4
N$64: IC33.6 IC34.6 IC39.6
N$65: IC33.8 IC34.9 IC39.8
N$66: IC33.11 IC34.12 IC37.2
N$67: IC24.3 IC30.5
N$68: IC33.13 IC34.15 IC37.4
N$69: IC33.15 IC34.16 IC37.6
N$70: IC24.1 IC30.4
N$71: IC10.10 IC29.10 IC30.6
N$72: IC10.9 IC29.3
OPERAND-CLK: IC14.19 IC34.11
OUT: IC21.8 IC21.13 R10.2 X1.C27
OUT-OFF: IC15.16 IC21.11
OUT-ON: IC15.19 IC21.9
READY: IC11.9 SV4.12
REG-LD-ID0: IC32.9 IC33.9 IC35.1 X1.B13
REG-LD-ID1: IC32.7 IC33.7 IC35.2 X1.B14
REG-LD-ID2: IC24.12 IC32.5 IC33.5 X1.B15
REG-LD-ID3: IC24.13 IC32.3 IC33.3 X1.B16
REG-RD-ID0: IC32.18 IC33.18 X1.B9
REG-RD-ID1: IC32.16 IC33.16 X1.B10
REG-RD-ID2: IC32.14 IC33.14 X1.B11
REG-RD-ID3: IC32.12 IC33.12 X1.B12
RESET: IC10.1 IC11.5 IC23.3 IC23.4 IC23.8 IC23.11 IC24.10 IC30.1
RUN: IC7.2 IC12.2 IC23.1 IC23.5
SINGLE-STEP-CLK: IC7.13 SS-SEL.2
SINGLE-STEP/WAIT: IC7.12 IC31.1 IC31.5
SOFT-HALT: IC15.15 IC35.5
SPARE3: IC13.6 JP2.2
SRC-ADDR: IC14.5 IC39.1
U-2-BYTE-OPERAND-SEL: IC13.17 SV4.10
U-AC-LD: IC15.4 SV4.7
U-AC-LD-INV: IC16.18 SV4.3
U-AC-RD: IC15.3 SV4.5
U-ALU-FUNC: IC16.7 SV3.34
U-BRANCH-RD: IC13.3 SV4.35
U-HL-SWAP: IC15.13 SV4.13
U-INT-JMP: IC13.13 SV4.6
U-INTA: IC14.3 SV4.19
U-IO-ADDR-LD: IC16.3 SV3.30
U-IO-RD: IC18.7 SV3.39
U-IO-WR: IC18.8 SV3.4
U-MEM-RD: IC18.3 SV3.35
U-MEM-WR: IC18.4 SV3.37
U-REG-DN: IC19.17 SV3.31
U-REG-FUNC-LD: IC20.4 SV3.5
U-REG-FUNC-RD: IC20.3 SV3.3
U-REG-RD-HI: IC19.13 SV3.27
U-REG-RD-LO: IC19.7 SV3.23
U-REG-UP: IC19.18 SV3.33
U-SR-LD: IC15.7 SV4.9
U-TMP-REG-LD0: IC18.14 SV3.8
U-TMP-REG-LD1: IC18.18 SV3.12
U-TMP-REG-RD0: IC18.13 SV3.6
U-TMP-REG-RD1: IC18.17 SV3.10
U-VMA: IC16.4 SV3.32
UADDR-REG-ID0: IC17.3 SV3.14
UADDR-REG-ID1: IC17.4 SV3.16
UADDR-REG-ID2: IC17.7 SV3.18
UADDR-REG-ID3: IC17.8 SV3.20
UALU0: IC16.8 SV3.36
UALU1: IC16.13 SV3.38
UALU2: IC16.14 SV3.40
UALU3: IC16.17 SV4.1
UBR-TEST: IC15.8 SV4.11
UBRANCH-LD-HI: IC13.8 SV4.4
UBRANCH-LD-LO: IC13.4 SV4.37
UCODE-CLK: IC7.5 IC10.6
UCODE-COUNT-RESET: IC12.13 IC14.16 IC24.2 IC29.4
UDEST-ADDR: IC13.18 JP5.4
UINT-EN: IC14.13 SV4.27
UINT-LD-HI: IC14.7 SV4.23
UINT-LD-LO: IC13.14 SV4.21
UINT-START: IC14.8 SV4.25
UIO-ADDR0: IC17.13 SV3.22
UIO-ADDR1: IC17.14 SV3.24
UIO-ADDR2: IC17.17 SV3.26
UIO-ADDR3: IC17.18 SV3.28
ULD-INS-REG: IC14.14 SV4.29
UOPERAND-CLK: IC14.18 SV4.33
UOUT-OFF: IC15.17 SV4.15
UOUT-ON: IC15.18 SV4.17
UREG-LD-HI: IC19.14 SV3.29
UREG-LD-ID0: IC20.17 SV3.15
UREG-LD-ID1: IC20.18 SV3.17
UREG-LD-ID2: IC19.3 SV3.19
UREG-LD-ID3: IC19.4 SV3.21
UREG-LD-LO: IC19.8 SV3.25
UREG-RD-ID0: IC20.7 SV3.7
UREG-RD-ID1: IC20.8 SV3.9
UREG-RD-ID2: IC20.13 SV3.11
UREG-RD-ID3: IC20.14 SV3.13
USOFT-HALT: IC15.14 SV4.8
USPARE3: IC13.7 JP5.1
USRC-ADDR: IC14.4 JP5.3
UUCODE-COUNT-RESET: IC14.17 SV4.31
VCC: C1.1 C2.1 C3.1 C4.1 C5.1 C6.1 C7.1 C8.1 C9.1 C10.1 C11.1 C12.1 C13.1 C14.1 C15.1 C16.1 C17.1 C18.1 C19.1 C20.1 C21.1 C22.1 C23.1 C24.1 C25.1 C26.1 C27.1 C28.1 C29.1 C30.1 C31.1 C32.1 C33.1 C34.1 C35.1 C36.1 IC1.20 IC2.20 IC3.16 IC4.16 IC5.4 IC5.11 IC5.16 IC6.4 IC6.11 IC6.16 IC7.14 IC8.2 IC8.4 IC8.6 IC8.8 IC8.11 IC8.13 IC8.15 IC8.17 IC8.20 IC9.20 IC10.14 IC11.14 IC12.14 IC13.20 IC14.20 IC15.20 IC16.20 IC17.20 IC18.20 IC19.20 IC20.20 IC21.14 IC22.2 IC22.10 IC22.12 IC22.14 IC23.14 IC24.14 IC25.20 IC26.20 IC27.20 IC28.20 IC29.14 IC30.14 IC31.14 IC32.20 IC33.20 IC34.20 IC35.14 IC36.14 IC37.20 IC39.20 QG1.14 R1.2 R8.2 R9.2 R16.1 RESET.2 SS/WAIT.2 STEP-CLK.2 SV3.1 SV3.2 X1.A2 X1.A31 X1.B2 X1.B31 X1.C2 X1.C31

## Tracks (layer width: path | path; a pad name or v marks a point on that pad's centre or on a via)
-2-BYTE-OPERAND-SEL  (via drill 0.25)
  Top 0.127: IC33.1 21.59,78.74 IC33.19 | v70.17,17.46 IC36.3
  Route2 0.127: IC33.1 25.72,69.53 25.72,65.72 43.5,47.94 43.5,38.42 52.39,29.53 57.78,29.53 66.99,20.32 IC36.3
  Bottom 0.127: v70.17,17.46 70.48,17.14 93.03,17.14 94.61,15.56 104.46,15.56 106.05,17.14 151.13,17.14 152.08,16.19 152.08,13.65 150.18,13.65 IC13.16
-AC-LD  (via drill 0.25)
  Top 0.127: v61.59,34.61 61.59,38.1 59.69,40.01 v59.69,42.23 | v47.31,58.1 47.31,62.87 v43.81,66.36
  Route2 0.127: v59.69,42.23 56.83,45.09 56.83,46.04 51.12,51.75 50.16,51.75 47.31,54.61 v47.31,58.1
  Bottom 0.127: IC15.5 80.96,34.61 v61.59,34.61 | v43.81,66.36 43.5,66.04 30.16,66.04 29.21,66.99 20.95,66.99 16.83,71.12 X1.C22
-AC-LD-INV  (via drill 0.25)
  Top 0.127: IC16.19 24.13,104.46 v12.7,93.03
  Route15 0.127: v12.7,93.03 12.7,72.39 11.75,71.44 11.75,67.94 10.16,66.36 X1.C20
-AC-RD  (via drill 0.25)
  Top 0.127: IC15.2 82.87,41.91 89.53,48.58 v89.53,51.75
  Route2 0.127: v21.59,50.8 11.75,60.64 11.75,66.67 10.16,68.26 X1.C21
  Bottom 0.127: v89.53,51.75 73.66,51.75 72.71,50.8 64.77,50.8 64.14,51.44 49.21,51.44 48.58,52.07 47.31,52.07 45.72,50.48 21.91,50.48 v21.59,50.8
-ALU-FUNC
  Bottom 0.127: IC16.6 30.8,95.57 13.34,95.57 10.48,92.71 4.76,92.71 2.86,90.81 2.86,79.69 2.54,79.38 2.54,78.74 3.49,78.74 4.13,78.11 4.13,74.93 1.27,72.07 1.27,54.93 6.35,54.93 6.99,54.29 9.21,54.29 X1.C15
-BRANCH-RD  (via drill 0.25)
  Top 0.127: IC26.1 50.8,91.76 v52.07,93.03 | v133.03,86.04 133.03,92.08 111.76,113.35 83.19,113.35 73.66,103.82 v73.66,101.6
  Bottom 0.127: v52.07,93.03 52.07,99.06 51.44,99.06 | IC27.1 51.44,99.06 | IC13.2 142.56,9.21 146.37,9.21 147.64,7.94 147.64,6.03 148.91,6.03 150.18,7.3 150.18,9.21 158.43,9.21 177.16,27.94 177.16,63.82 170.18,63.82 169.54,64.45 169.54,86.04 v133.03,86.04 | v73.66,101.6 72.71,100.65 53.02,100.65 51.44,99.06
-BUS-EN  (via drill 0.25)
  Top 0.127: IC17.1 21.59,36.2 25.4,40.01 25.4,53.98 26.99,55.56 39.69,55.56 40.96,56.83 46.67,56.83 IC18.1 v53.34,58.42 | IC13.1 138.43,11.75 132.08,18.1 IC14.1 132.08,24.77 131.13,25.72 131.13,29.53 IC1.1 132.08,33.02 134.62,35.56 IC1.19 132.08,40.64 IC2.1 132.08,45.4 134.62,47.94 IC2.19 | X1.C28 21.59,97.79 IC16.1 22.23,99.06 28.26,105.09 29.53,105.09 30.8,106.36 30.8,107.63 35.24,112.08 40.64,112.08 42.86,109.86 v42.86,109.54 | IC15.1 81.28,52.7 79.69,54.29 79.69,58.1 | 79.69,75.88 79.69,58.1 | IC19.1 79.69,75.88 | 79.69,75.88 79.69,107 81.28,108.58 IC20.1 85.41,109.22 87.63,111.44 105.73,111.44 IC11.8 | 79.69,58.1 v80.01,58.1
  Bottom 0.127: v42.86,109.54 43.18,109.22 IC20.1 | IC2.1 131.44,42.55 123.19,42.55 122.24,43.5 106.05,43.5 105.41,42.86 82.87,42.86 IC15.1 | v53.34,58.42 53.98,57.78 58.1,57.78 58.42,58.1 v80.01,58.1
-DO-INT  (via drill 0.25)
  Top 0.127: IC8.1 50.8,38.1 IC8.19
  Route15 0.127: IC11.2 107,85.41 106.05,85.41 99.69,79.06 99.69,61.91 97.79,60.01 95.25,60.01 93.98,58.74 93.98,55.56 87.63,49.21 v87.63,47.94
  Bottom 0.127: v87.63,47.94 87.31,48.26 83.19,48.26 82.23,47.31 63.18,47.31 62.87,46.99 61.59,46.99 61.28,47.31 55.56,47.31 54.29,46.04 54.29,40.64 IC8.19
-FP-HALT
  Top 0.127: R8.1 167.32,18.1 172.72,18.1 173.35,18.73 175.26,18.73 HALT.2
  Bottom 0.127: IC36.1 63.82,21.91 79.06,21.91 80.64,20.32 103.19,20.32 103.5,20 105.73,20 106.36,20.64 128.27,20.64 128.91,20 131.13,20 131.76,20.64 164.78,20.64 R8.1
-HALT-CONT  (via drill 0.25)
  Top 0.127: v153.03,28.57 155.57,28.57 160.02,33.02 | R9.1 160.02,33.02 | 160.02,33.02 171.13,33.02 173.35,35.24 175.26,35.24 CONT.2
  Bottom 0.127: IC36.9 76.52,26.35 79.06,26.35 80.96,28.26 115.89,28.26 116.2,28.57 v153.03,28.57
-HL-SWAP  (via drill 0.25)
  Top 0.127: v13.34,58.1 13.34,59.37 10.48,62.23 4.13,62.23 3.81,62.55 3.81,76.52 5.08,77.79 5.71,77.79 6.67,78.74 6.67,79.38 6.99,79.69 9.21,79.69 X1.C25
  Route15 0.127: v14.92,32.38 13.65,33.66 13.65,57.78 v13.34,58.1
  Bottom 0.127: IC15.12 87.31,22.54 61.59,22.54 57.47,18.41 26.67,18.41 25.08,20 25.08,23.18 21.91,23.18 14.92,30.16 v14.92,32.38
-INT  (via drill 0.25)
  Top 0.127: X1.C13 8.57,46.67 6.99,46.67 6.35,46.04 6.35,22.54 7.62,21.27 10.79,21.27 23.18,8.89 23.18,6.35 v25.4,4.13 | -INT-PULLUP.2 158.12,46.35 158.12,35.56 153.35,30.8 153.35,29.53 152.4,28.57 153.67,27.3 153.67,17.46 152.4,16.19 152.4,3.81 JP1.3
  Bottom 0.127: v25.4,4.13 28.89,0.64 149.22,0.64 JP1.3
-INT-JMP  (via drill 0.25)
  Top 0.127: IC28.1 38.73,7.62 37.15,6.03 28.89,6.03 27.62,7.3 27.62,9.84 22.54,14.92 22.54,16.19 20,18.73 18.73,18.73 14.29,23.18 v14.29,37.47 | v14.29,38.73 21.27,45.72 IC25.1 | v156.21,12.7 IC13.12 | v101.28,9.21 101.28,8.26 98.42,5.4 v96.52,5.4
  Bottom 0.127: v14.29,38.73 v14.29,37.47 | v156.21,12.7 153.35,9.84 137.79,9.84 136.53,8.57 130.49,8.57 128.91,10.16 102.23,10.16 v101.28,9.21 | v96.52,5.4 62.55,5.4 61.91,6.03 46.04,6.03 IC28.1
-INTA  (via drill 0.25)
  Top 0.127: v6.03,46.35 v6.03,22.23
  Route15 0.127: IC14.2 131.13,15.56 131.13,6.99 124.78,0.64 28.26,0.64 v27.94,0.95
  Bottom 0.127: v27.94,0.95 24.45,4.45 19.37,4.45 6.03,17.78 v6.03,22.23 | v6.03,46.35 6.03,49.85 9.21,49.85 X1.C14
-IO-ADDR-LD  (via drill 0.25)
  Top 0.127: v17.46,53.66 17.46,50.48 X1.C11
  Route15 0.127: IC16.2 13.65,88.58 13.65,62.23 14.29,61.59 14.29,56.83 v17.46,53.66
-IO-RD  (via drill 0.25)
  Top 0.127: v52.7,63.82 44.45,72.07 44.13,72.07 43.5,72.71 43.5,76.52 v43.81,76.83
  Bottom 0.127: IC18.6 63.5,63.82 v52.7,63.82 | v43.81,76.83 43.5,76.52 20.32,76.52 19.37,77.47 8.89,77.47 X1.B25
-IO-WR  (via drill 0.25)
  Top 0.127: v20.64,62.23 20.64,79.06 v18.73,80.96
  Bottom 0.127: IC18.9 69.53,62.55 65.72,62.55 64.45,61.28 64.45,59.37 63.18,59.37 61.91,60.64 61.91,62.55 49.53,62.55 48.9,61.91 45.4,61.91 44.77,62.55 20.95,62.55 v20.64,62.23 | v18.73,80.96 17.46,82.23 8.57,82.23 X1.B26
-MEM-CPU-RESET  (via drill 0.25)
  Top 0.127: JP2.1 139.06,0.64 156.53,0.64 166.05,10.16 v166.05,18.73 | v105.41,58.1 105.41,58.74 v103.19,60.96
  Bottom 0.127: v166.05,18.73 176.53,29.21 176.53,53.34 167.32,53.34 165.1,55.56 143.51,55.56 141.6,57.47 106.68,57.47 106.36,57.15 v105.41,58.1 | v103.19,60.96 100.65,58.42 JP5.2
-MEM-RD  (via drill 0.25)
  Top 0.127: IC18.2 53.34,63.82 v45.09,72.07
  Bottom 0.127: v45.09,72.07 13.65,72.07 13.02,72.71 8.57,72.71 X1.B23
-MEM-WR  (via drill 0.25)
  Top 0.127: v18.73,59.37 13.97,59.37 10.79,62.55 4.45,62.55 4.13,62.87 4.13,74.3 5.08,75.25 6.67,75.25 X1.B24
  Bottom 0.127: IC18.5 59.37,59.37 v18.73,59.37
-ONE-OPERAND-SEL  (via drill 0.25)
  Top 0.127: IC32.1 21.59,66.04 IC32.19
  Route2 0.127: v106.68,78.74 106.68,78.11 100.01,71.44 100.01,62.87 97.16,60.01 94.61,60.01 90.49,55.88 90.49,54.29 84.77,48.58 83.5,48.58 79.06,44.13 79.06,27.62 73.34,21.91 71.44,21.91 IC36.4
  Route15 0.127: v19.68,41.59 17.46,43.81 17.46,53.02 18.1,53.66 18.1,54.93 17.46,55.56 17.46,56.83 IC32.1
  Bottom 0.127: IC36.4 69.85,18.1 62.87,18.1 62.55,17.78 58.74,17.78 58.42,17.46 20,17.46 15.24,22.23 15.24,28.57 13.65,28.57 10.16,32.07 9.53,32.07 9.21,32.38 9.21,39.69 17.78,39.69 v19.68,41.59 | IC39.19 159.7,78.42 128.27,78.42 127.32,77.47 122.56,77.47 121.28,78.74 v106.68,78.74
-REG-DN  (via drill 0.25)
  Top 0.127: v76.2,75.88 v76.2,70.17
  Bottom 0.127: IC19.16 87.31,68.9 77.47,68.9 v76.2,70.17 | v76.2,75.88 75.56,76.52 50.16,76.52 48.58,74.93 45.72,74.93 44.77,75.88 20.32,75.88 19.05,74.61 11.43,74.61 11.11,74.93 4.76,74.93 3.81,73.98 3.81,67.63 6.67,67.63 X1.B21
-REG-FUNC-LD  (via drill 0.25)
  Top 0.127: v18.73,98.42 10.16,89.85 4.45,89.85 1.27,86.68 v1.27,79.38
  Route15 0.127: v1.27,79.38 0.64,78.74 0.64,40.96 4.45,37.15 5.71,37.15 7.3,35.56 X1.B8
  Bottom 0.127: IC20.5 78.11,102.23 49.21,102.23 48.58,102.87 25.4,102.87 23.18,100.65 20.95,100.65 v18.73,98.42
-REG-FUNC-RD  (via drill 0.25)
  Top 0.127: v75.25,107 69.53,112.71 19.68,112.71 v1.27,94.3
  Bottom 0.127: IC20.2 80.96,107 v75.25,107 | v1.27,94.3 1.27,80.01 0.64,79.38 0.64,33.97 6.67,33.97 X1.B7
-REG-LD-HI  (via drill 0.25)
  Route15 0.127: v25.08,34.61 20.32,39.37 19.05,39.37 13.97,44.45 13.97,61.28 10.79,64.45 9.53,64.45 7.94,66.04 X1.B20
  Bottom 0.127: IC36.12 65.09,30.16 56.52,30.16 55.56,31.11 26.67,31.11 25.08,32.7 v25.08,34.61
-REG-LD-LO  (via drill 0.25)
  Top 0.127: IC36.10 72.39,26.67 68.58,22.86 v68.58,21.27 | v11.11,32.38 11.11,36.2 10.16,37.15 6.99,37.15 6.67,37.47 6.67,43.81 7.62,44.77 10.79,44.77 11.11,45.09 11.11,48.9 10.79,49.21 9.53,49.21 8.57,48.26 8.57,47.62 8.26,47.31 4.45,47.31 2.54,49.21 2.54,54.93 v1.91,55.56
  Bottom 0.127: v68.58,21.27 68.58,18.41 62.55,18.41 62.23,18.1 58.42,18.1 58.1,17.78 22.23,17.78 20,20 20,24.45 12.06,32.38 v11.11,32.38 | v1.91,55.56 1.91,60.01 6.03,60.01 6.99,60.96 X1.B18
-REG-RD-HI  (via drill 0.25)
  Top 0.127: v58.1,58.42 53.98,58.42 51.75,60.64 51.75,64.14 v48.58,67.31
  Bottom 0.127: IC19.12 87.31,58.74 58.42,58.74 v58.1,58.42 | v48.58,67.31 45.4,67.31 43.81,65.72 29.53,65.72 28.57,66.67 20.64,66.67 20,67.31 13.02,67.31 10.16,64.45 8.57,64.45 X1.B19
-REG-RD-LO  (via drill 0.25)
  Top 0.127: v60.01,63.18 v61.59,64.77
  Bottom 0.127: v61.59,64.77 IC19.6 | v60.01,63.18 59.69,62.87 49.21,62.87 48.58,62.23 45.72,62.23 45.09,62.87 20,62.87 16.51,59.37 8.57,59.37 X1.B17
-REG-UP  (via drill 0.25)
  Route15 0.127: v68.26,73.34 65.72,75.88 v52.39,75.88
  Bottom 0.127: IC19.19 87.63,73.66 73.98,73.66 73.66,73.34 v68.26,73.34 | v52.39,75.88 51.75,75.25 49.53,75.25 48.9,74.61 45.4,74.61 44.45,75.56 20.64,75.56 19.37,74.3 11.11,74.3 10.79,74.61 6.99,74.61 6.03,73.66 6.03,72.39 4.76,72.39 4.13,71.75 4.13,70.17 6.03,70.17 6.99,71.12 X1.B22
-RESET  (via drill 0.25)
  Top 0.127: IC4.1 106.68,70.48 105.73,71.44 105.73,77.15 106.36,77.79 107.63,77.79 113.03,83.19 v113.03,86.04 | IC3.1 13.65,7.62 0.64,20.64 0.64,86.68 4.45,90.49 9.21,90.49 X1.C30
  Bottom 0.127: 115.25,86.04 117.79,86.04 IC11.6 | 115.25,86.04 v113.03,86.04 | 115.25,86.04 115.25,89.53 105.09,89.53 104.46,88.9 90.81,88.9 89.53,90.17 58.42,90.17 58.1,90.49 48.9,90.49 48.58,90.17 44.13,90.17 43.5,89.53 22.54,89.53 19.37,92.71 18.1,92.71 16.83,91.44 X1.C30
-SR-LD  (via drill 0.25)
  Route2 0.127: v56.83,30.8 54.93,32.7 54.93,34.29 46.04,43.18 46.04,61.28 40.32,66.99 39.05,66.99 37.78,68.26 37.78,72.71 v38.1,73.03
  Bottom 0.127: IC15.6 80.33,30.8 v56.83,30.8 | v38.1,73.03 38.1,75.25 20.95,75.25 19.37,73.66 X1.C23
-TMP-REG-LD0  (via drill 0.25)
  Top 0.127: IC18.15 63.5,71.75 62.55,72.71 62.55,76.83 v62.87,77.15
  Bottom 0.127: v62.87,77.15 48.9,77.15 48.58,77.47 47.94,77.47 47.31,78.11 21.27,78.11 19.37,80.01 4.45,80.01 4.13,79.69 3.49,80.33 3.49,85.41 6.67,85.41 X1.B28
-TMP-REG-LD1  (via drill 0.25)
  Top 0.127: IC18.19 53.34,69.22 45.72,76.83 v45.72,82.23
  Route15 0.127: v45.72,82.23 45.72,85.72 46.04,86.04 46.04,87 v43.81,89.22
  Bottom 0.127: v43.81,89.22 20.32,89.22 19.37,90.17 8.89,90.17 X1.B30
-TMP-REG-RD0  (via drill 0.25)
  Top 0.127: v57.15,69.22 54.29,72.07 54.29,74.61 51.44,77.47 v47.31,77.47 | v29.53,77.47 29.53,78.74 v27.94,80.33
  Bottom 0.127: IC18.12 69.53,70.17 58.1,70.17 v57.15,69.22 | v47.31,77.47 46.99,77.79 29.84,77.79 v29.53,77.47 | v27.94,80.33 27.94,83.82 11.75,83.82 10.79,84.77 8.57,84.77 X1.B27
-TMP-REG-RD1  (via drill 0.25)
  Top 0.127: IC18.16 60.96,71.75 59.37,73.34 v59.37,79.69 | v6.67,83.19 6.67,87.95 X1.B29
  Bottom 0.127: v59.37,79.69 49.53,79.69 48.9,80.33 45.4,80.33 44.77,79.69 20.32,79.69 19.68,80.33 6.99,80.33 6.67,80.64 v6.67,83.19
-VMA  (via drill 0.25)
  Route2 0.127: v2.54,91.12 0.64,89.22 0.64,55.56 v1.91,54.29
  Bottom 0.127: IC16.5 29.53,96.84 12.06,96.84 10.16,94.93 4.45,94.93 2.54,93.03 v2.54,91.12 | v1.91,54.29 1.91,44.77 9.21,44.77 X1.C12
ADDR-REG-ID0  (via drill 0.25)
  Top 0.127: IC39.9 151.76,62.23 148.91,59.37 142.88,59.37 135.57,52.07 135.57,48.26 v134.62,47.31 | v133.03,46.99 131.76,45.72 131.76,43.81 127.64,39.69 126.05,39.69 124.78,38.42 124.78,36.51 123.83,35.56 123.83,16.51 122.87,15.56 122.87,14.29 122.24,13.65 v120.97,13.65
  Route15 0.127: IC37.18 111.76,13.97 99.69,1.91 v95.57,1.91
  Bottom 0.127: IC39.9 154.62,61.28 162.88,61.28 163.51,61.91 163.51,77.47 IC39.18 | v95.57,1.91 94.93,1.27 57.78,1.27 57.15,1.91 28.26,1.91 25.4,4.76 20,4.76 11.11,13.65 11.11,22.86 X1.C3 | v134.62,47.31 134.3,46.99 v133.03,46.99 | v120.97,13.65 113.35,13.65 IC37.18
ADDR-REG-ID1  (via drill 0.25)
  Top 0.127: IC37.16 116.84,17.14 118.43,18.73 118.43,23.81 120.65,26.04 120.65,33.66 124.14,37.15 124.14,39.05 128.27,43.18 129.86,43.18 131.13,44.45 131.13,46.35 133.35,48.58 133.35,53.02 141.92,61.59 147.96,61.59 IC39.7 158.75,72.39 IC39.16
  Route15 0.127: v115.57,8.57 115.57,13.97 IC37.16
  Bottom 0.127: X1.C4 14.29,21.27 14.29,11.43 19.68,11.43 23.18,7.94 23.18,6.67 24.45,5.4 45.72,5.4 46.67,4.45 94.3,4.45 94.61,4.76 108.27,4.76 108.9,4.13 112.71,4.13 115.57,6.99 v115.57,8.57
ADDR-REG-ID2  (via drill 0.25)
  Top 0.127: IC39.14 160.34,66.36 153.35,66.36 148.27,61.28 142.24,61.28 133.67,52.7 133.67,48.26 131.44,46.04 131.44,44.13 130.18,42.86 128.59,42.86 124.46,38.73 124.46,36.83 123.51,35.88 123.51,18.73 121.92,17.14 IC37.14 120.33,13.65 v110.81,13.65
  Route2 0.127: v110.81,13.65 v106.36,9.21
  Bottom 0.127: IC39.5 155.26,70.8 162.24,70.8 162.88,70.17 162.88,67.31 IC39.14 | X1.C5 14.61,23.5 14.61,13.97 17.78,13.97 22.54,9.21 41.27,9.21 41.59,8.89 43.81,8.89 44.13,9.21 70.17,9.21 73.34,6.03 93.34,6.03 94.93,7.62 104.78,7.62 v106.36,9.21
ADDR-REG-ID3  (via drill 0.25)
  Top 0.127: IC37.12 127,17.46 130.81,21.27 v130.81,23.18 | v157.16,44.45 157.16,53.66 162.88,59.37 162.88,60.64 IC39.12
  Route15 0.127: IC37.12 v127,12.7
  Bottom 0.127: v130.81,23.18 131.44,23.81 156.21,23.81 157.16,24.77 v157.16,44.45 | IC39.3 154.94,76.2 161.93,76.2 163.19,74.93 163.19,62.23 IC39.12 | X1.C6 14.92,25.72 14.92,14.29 18.1,14.29 20.95,11.43 93.66,11.43 94.93,12.7 v127,12.7
ALU0  (via drill 0.25)
  Route15 0.127: v23.18,91.44 23.18,90.17 14.92,81.92 v14.92,56.83
  Bottom 0.127: IC16.9 37.78,94.93 37.78,91.44 v23.18,91.44 | v14.92,56.83 13.97,55.88 X1.C16
ALU1  (via drill 0.25)
  Top 0.127: IC16.12 41.91,100.97 40.32,99.38 40.32,98.11 38.73,96.52 27.94,96.52 v27.62,96.2
  Route15 0.127: v27.62,96.2 25.72,94.3 25.72,92.08 17.14,83.5 17.14,63.18 v19.05,61.28
  Bottom 0.127: v19.05,61.28 16.51,58.74 10.48,58.74 X1.C17
ALU2  (via drill 0.25)
  Top 0.127: v3.17,76.2 3.17,62.55 3.81,61.91 9.21,61.91 X1.C18
  Route2 0.127: v2.22,80.33 2.22,77.15 v3.17,76.2
  Bottom 0.127: IC16.15 32.7,108.27 15.24,108.27 1.91,94.93 1.91,80.33 v2.22,80.33
ALU3  (via drill 0.25)
  Top 0.127: IC16.16 31.75,106.05 25.08,99.38 25.08,98.11 22.86,95.89 20.95,95.89 11.75,86.68 v11.75,84.45
  Route2 0.127: v11.75,84.45 11.75,69.22 v14.29,66.67
  Bottom 0.127: v14.29,66.67 11.11,63.5 X1.C19
BR-COND  (via drill 0.25)
  Top 0.127: v102.87,42.23 102.87,46.99 101.28,48.58 101.28,49.85 v99.06,52.07 | v78.11,55.24 78.11,59.69 70.17,67.63 v70.17,70.17 | v15.56,75.25 v20,70.8
  Bottom 0.127: IC29.1 106.36,42.23 v102.87,42.23 | v99.06,52.07 99.06,53.02 80.33,53.02 v78.11,55.24 | v70.17,70.17 69.85,70.48 36.83,70.48 35.24,68.9 35.24,66.99 31.43,66.99 30.16,68.26 30.16,70.8 v20,70.8 | v15.56,75.25 14.61,76.2 X1.C24
BR-TEST  (via drill 0.25)
  Top 0.127: IC15.9 84.45,24.13 88.58,28.26 89.85,28.26 92.08,30.48 v92.08,34.92 | v101.28,35.24 102.23,36.2 v102.23,40.32
  Bottom 0.127: v92.08,34.92 92.39,35.24 v101.28,35.24 | v102.23,40.32 107.63,40.32 IC29.2
BRANCH-LD-HI  (via drill 0.25)
  Top 0.127: v175.58,24.13 177.16,25.72 177.16,80.01 v172.09,85.09
  Bottom 0.127: IC13.9 158.75,8.89 159.07,8.89 174.31,24.13 v175.58,24.13 | v172.09,85.09 166.69,90.49 163.19,90.49 154.94,98.74 90.49,98.74 89.22,97.47 77.15,97.47 IC26.11
BRANCH-LD-LO  (via drill 0.25)
  Top 0.127: v167.32,18.73 167.32,26.04 176.53,35.24 176.53,37.15 175.9,37.78 175.9,56.2 176.53,56.83 176.53,80.01 168.28,88.27 v168.28,92.39
  Bottom 0.127: IC13.5 148.59,9.53 158.12,9.53 v167.32,18.73 | v168.28,92.39 168.28,99.06 120.65,99.06 113.35,106.36 90.49,106.36 89.85,105.73 74.61,105.73 IC27.11
BUS-LATCH-CLK  (via drill 0.25)
  Top 0.127: IC13.11 161.29,20.32 IC14.11 | v107,21.59 109.22,21.59 IC35.11 | IC19.11 85.09,50.8 85.09,46.35 81.92,43.18 v80.96,43.18 80.64,43.18 79.38,44.45 | IC18.11 73.66,65.41 79.38,59.69 | 79.38,44.45 79.38,59.69 | IC16.11 48.26,106.68 50.16,108.58 71.12,108.58 72.71,107 72.71,101.92 79.38,95.25 79.38,87.63 | 79.38,59.69 79.38,87.63 | 79.38,87.63 v79.06,87.63 | v83.19,21.91 81.92,23.18 80.33,23.18 79.38,24.13 79.38,44.45
  Bottom 0.127: v107,21.59 106.68,21.59 105.41,20.32 103.82,20.32 103.5,20.64 89.85,20.64 IC15.11 88.58,21.91 v83.19,21.91 | IC14.11 153.67,27.94 153.03,27.94 152.72,28.26 116.52,28.26 114.94,26.67 IC35.11 | IC17.11 48.9,40.64 50.48,39.05 75.25,39.05 79.38,43.18 v80.96,43.18 | IC20.11 87.63,87.63 v79.06,87.63
CADDR0  (via drill 0.25)
  Top 0.127: v100.01,49.21 100.01,44.45 100.65,43.81 100.65,39.69 SV4.14
  Bottom 0.127: IC2.16 140.65,51.12 118.43,51.12 118.11,51.44 107.31,51.44 107,51.12 101.92,51.12 v100.01,49.21
CADDR1  (via drill 0.25)
  Route15 0.127: IC2.14 145.41,47.62 139.06,47.62 v127.95,36.51
  Bottom 0.127: v127.95,36.51 127,35.56 122.24,35.56 121.28,34.61 104.78,34.61 104.46,34.29 SV4.16
CADDR2  (via drill 0.25)
  Top 0.127: IC2.12 146.05,43.18 v146.05,42.86 | v101.92,34.92 98.74,31.75 SV4.18
  Bottom 0.127: v146.05,42.86 146.05,36.2 134.3,36.2 133.99,35.88 131.44,35.88 130.18,37.15 127.95,37.15 126.68,35.88 112.39,35.88 112.08,35.56 105.73,35.56 104.46,36.83 103.82,36.83 v101.92,34.92
CADDR3  (via drill 0.25)
  Top 0.127: v131.13,35.56 129.86,34.29 127.64,34.29 v125.41,32.07
  Bottom 0.127: IC2.9 150.18,39.69 149.54,39.69 148.27,38.42 148.27,35.88 134.62,35.88 134.3,35.56 v131.13,35.56 | v125.41,32.07 106.36,32.07 103.5,29.21 SV4.20
CADDR4  (via drill 0.25)
  Top 0.127: IC2.7 147.32,40.01 145.73,38.42 v145.73,35.24 | v119.7,33.97 117.79,32.07 117.79,29.53 115.25,26.99 115.25,25.72 110.49,20.95 106.36,20.95 104.46,22.86 103.82,22.86 99.38,27.3 98.42,27.3 SV4.22
  Bottom 0.127: v145.73,35.24 145.1,34.61 130.18,34.61 129.86,34.29 120.02,34.29 v119.7,33.97
CADDR5  (via drill 0.25)
  Route2 0.127: v110.17,44.13 108.27,42.23 108.27,34.92 97.79,24.45 SV4.24
  Bottom 0.127: IC2.5 140.65,43.5 130.81,43.5 130.18,42.86 123.51,42.86 122.24,44.13 v110.17,44.13
CADDR6  (via drill 0.25)
  Top 0.127: v133.99,36.51 133.99,35.56 124.46,26.04 v124.46,24.13
  Bottom 0.127: IC1.18 135.57,36.51 v133.99,36.51 | v124.46,24.13 124.14,23.81 105.41,23.81 104.46,22.86 99.06,22.86 SV4.26
CADDR7  (via drill 0.25)
  Top 0.127: IC1.16 142.24,32.38 143.51,31.11 143.51,22.54 v142.88,21.91 | v131.44,21.59 131.44,20.32 127.95,16.83 127.95,14.29 126.68,13.02 106.05,13.02 99.69,19.37 98.11,19.37 SV4.28
  Bottom 0.127: v142.88,21.91 142.56,21.59 v131.44,21.59
CADDR8  (via drill 0.25)
  Top 0.127: IC1.14 147.32,32.38 148.91,30.8 v148.91,21.27 | v112.08,21.91 110.17,20 110.17,18.1 109.22,17.14 104.46,17.14 v103.82,16.51
  Bottom 0.127: v148.91,21.27 148.59,20.95 130.49,20.95 129.86,20.32 129.22,20.32 127.64,21.91 v112.08,21.91 | SV4.30 v103.82,16.51
CADDR9  (via drill 0.25)
  Top 0.127: v115.25,23.18 113.98,23.18 110.49,19.68 110.49,17.78 109.54,16.83 104.78,16.83 103.82,15.88 99.69,20 94.61,20 94.3,19.68 94.3,15.88 95.25,14.92 96.84,14.92 SV4.32
  Bottom 0.127: IC1.12 153.99,39.69 155.26,39.69 155.89,39.05 155.89,28.26 155.57,27.94 155.89,27.62 155.89,25.08 130.18,25.08 129.86,25.4 128.91,25.4 126.68,23.18 v115.25,23.18
CADDR10  (via drill 0.25)
  Route15 0.127: IC1.9 138.75,16.83 138.11,16.83 v134.62,13.34
  Bottom 0.127: v134.62,13.34 133.03,11.75 98.11,11.75 SV4.34
CADDR11  (via drill 0.25)
  Top 0.127: IC1.7 147.32,28.57 148.27,27.62 148.27,16.83 147,15.56 v147,10.79
  Bottom 0.127: v147,10.79 146.37,10.16 137.48,10.16 136.21,8.89 130.81,8.89 129.22,10.48 101.92,10.48 100.33,8.89 SV4.36
CADDR12  (via drill 0.25)
  Top 0.127: IC1.5 142.24,28.57 143.19,27.62 143.19,22.86 140.65,20.32 140.65,17.14 v139.7,16.19 | v129.86,12.7 127.64,12.7 124.46,9.53 111.76,9.53 v110.49,8.26
  Bottom 0.127: v139.7,16.19 139.7,13.65 136.53,13.65 136.21,13.97 131.13,13.97 v129.86,12.7 | v110.49,8.26 110.49,6.03 98.11,6.03 SV4.38
CADDR13  (via drill 0.25)
  Top 0.127: v99.69,38.1 100.97,39.37 100.97,48.9 SV4.2
  Route2 0.127: v105.09,33.97 103.82,33.97 v99.69,38.1
  Bottom 0.127: IC1.3 135.57,32.07 130.18,32.07 129.86,31.75 128.91,31.75 127.64,33.02 109.54,33.02 108.58,33.97 v105.09,33.97
CNT-CLK  (via drill 0.25)
  Top 0.127: v124.46,27.3 124.46,35.56 v126.05,37.15 | v133.67,40.01 134.62,40.01 135.89,41.27 135.89,47.31 137.16,48.58 IC2.18
  Bottom 0.127: IC35.13 110.81,25.08 122.24,25.08 v124.46,27.3 | v126.05,37.15 128.91,40.01 v133.67,40.01
COUNT-FAULT  (via drill 0.25)
  Top 0.127: v144.15,40.32 144.15,40.64 143.83,40.96 143.83,44.13 148.91,49.21 148.91,52.39 v153.35,56.83
  Bottom 0.127: IC2.3 138.75,40.32 v144.15,40.32 | v153.35,56.83 157.48,60.96 163.19,60.96 163.51,61.28 164.15,60.64 164.15,60.01 163.83,59.69 163.83,59.05 167.96,59.05 168.28,59.37 168.28,81.28 131.76,81.28 130.81,82.23 127.64,82.23 127.32,82.55 122.56,82.55 122.24,82.23 113.35,82.23 IC10.12
COUNT-RESET
  Top 0.127: IC10.3 115.57,80.01 129.86,80.01 130.18,79.69 130.49,79.69 133.67,82.87 | IC5.14 133.67,82.87 | IC6.14 134.62,103.5 133.67,102.55 133.67,82.87
DATA0  (via drill 0.25)
  Top 0.127: IC28.3 IC28.2 46.99,10.79 30.48,27.3 30.48,41.27 27.3,44.45 27.3,45.72 | 27.3,45.72 IC25.3 | 27.3,45.72 28.89,44.13 51.75,44.13 IC9.2 | IC27.3 IC27.2 | v54.61,93.34 55.88,92.08 IC26.3 v53.66,84.14 | 8.26,65.09 7.62,64.45 6.03,64.45 X1.A19 | 8.26,65.09 8.57,65.41 8.57,73.66 9.53,74.61 10.79,74.61 12.06,75.88 12.06,76.83 19.05,83.82 24.13,83.82 IC34.3 v28.89,84.14 | v23.18,58.1 20.64,58.1 13.65,65.09 8.26,65.09
  Route15 0.127: IC25.3 25.08,47.31 25.08,47.94 20,53.02 20,54.93 v23.18,58.1
  Bottom 0.127: v54.61,93.34 54.61,99.06 IC27.2 | v28.89,84.14 v53.66,84.14
DATA1  (via drill 0.25)
  Top 0.127: v27.94,44.45 28.57,43.81 33.34,43.81 | 33.34,43.81 56.52,43.81 IC9.4 | IC28.4 52.07,8.26 45.4,14.92 45.4,16.19 42.86,18.73 40.32,18.73 33.34,25.72 33.34,43.81 | IC27.5 IC27.4 | v48.26,86.04 50.8,83.5 53.66,83.5 54.93,84.77 56.83,84.77 57.15,85.09 | IC26.4 57.15,85.09 | v12.38,67.31 12.38,69.85 12.06,70.17 12.06,75.25 12.38,75.56 12.38,76.52 19.37,83.5 28.89,83.5 29.53,84.14 29.53,86.04 IC34.4 | 57.15,85.09 v57.15,94.93 | v23.5,48.58 23.5,49.53 20,53.02 v20,56.52
  Bottom 0.127: IC28.5 IC28.4 | v27.94,44.45 28.89,45.4 | IC34.4 30.8,87.95 45.72,87.95 47.62,86.04 v48.26,86.04 | v12.38,67.31 6.35,67.31 X1.A20 6.03,66.04 6.03,63.5 6.99,62.55 8.57,62.55 8.57,60.33 8.26,60.01 6.67,60.01 6.67,57.78 6.99,57.47 19.05,57.47 v20,56.52 | IC27.4 57.15,97.79 v57.15,94.93 | 28.89,45.4 25.72,48.58 v23.5,48.58 | 28.89,45.4 IC25.4
DATA2  (via drill 0.25)
  Top 0.127: IC28.7 58.1,7.62 | 58.1,7.62 IC28.6 | v39.37,43.18 41.91,43.18 42.23,43.5 57.15,43.5 | 57.15,43.5 61.28,43.5 IC9.6 | 58.1,7.62 58.1,23.81 54.93,26.99 54.93,37.78 56.83,39.69 v56.83,41.91 | 57.15,43.5 v57.15,43.81 | IC27.7 IC27.6 | 43.18,82.87 53.66,82.87 55.24,84.45 59.37,84.45 | 43.18,82.87 40.96,82.87 37.47,86.36 IC34.7 33.66,83.19 19.68,83.19 12.7,76.2 12.7,75.25 12.38,74.93 12.38,72.07 12.7,71.75 v12.7,70.17 | 59.37,84.45 64.14,84.45 IC26.7 | 59.37,84.45 v59.37,92.71 | IC25.7 36.83,46.35 v43.18,52.7 | v45.09,58.42 43.18,60.33 43.18,82.87
  Bottom 0.127: v39.37,43.18 IC25.7 | v56.83,41.91 56.83,43.81 v57.15,43.81 | X1.A21 6.67,70.17 v12.7,70.17 | IC27.6 59.37,94.93 v59.37,92.71 | v43.18,52.7 43.18,57.78 44.45,57.78 v45.09,58.42
DATA3  (via drill 0.25)
  Top 0.127: v42.23,42.86 48.58,42.86 48.9,43.18 54.29,43.18 | 54.29,43.18 64.77,43.18 65.72,44.13 66.99,44.13 IC9.8 68.58,47.62 v64.77,51.44 | IC28.8 61.59,7.62 60.01,6.03 54.29,6.03 53.66,6.67 53.66,18.73 54.29,19.37 54.29,43.18 | v42.23,83.5 IC34.8 | v54.93,83.5 58.1,83.5 58.74,84.14 64.77,84.14 | 64.77,84.14 66.36,84.14 IC26.8 70.17,87.95 70.17,94.3 68.58,95.89 IC27.8 | v13.02,72.07 13.02,75.88 20,82.87 v33.97,82.87 | 64.77,84.14 v64.77,56.52
  Bottom 0.127: IC28.9 IC28.8 | v42.23,42.86 IC25.8 | IC27.9 IC27.8 | v54.93,83.5 v42.23,83.5 34.61,83.5 v33.97,82.87 | X1.A22 6.03,72.07 v13.02,72.07 | v64.77,56.52 v64.77,51.44
DATA4  (via drill 0.25)
  Top 0.127: IC25.13 40.01,53.34 41.59,54.93 70.17,54.93 | 70.17,54.93 72.07,54.93 IC9.11 | IC28.13 62.23,18.41 63.5,19.68 63.5,23.5 66.36,26.35 66.36,30.8 67.63,32.07 67.63,41.59 70.17,44.13 70.17,54.93 | 66.99,95.57 41.59,95.57 40.01,93.98 IC34.13 37.15,91.76 30.16,91.76 25.72,87.31 25.72,86.04 24.13,84.45 18.73,84.45 11.75,77.47 11.75,76.2 10.79,75.25 7.62,75.25 6.03,73.66 X1.A23 | IC26.13 66.99,95.57 | IC27.13 68.58,100.97 66.99,99.38 66.99,95.57 | v78.11,62.55 78.11,81.92 79.06,82.87 79.06,87 74.61,91.44 74.61,96.2 72.07,98.74 72.07,105.73 IC27.12
  Route2 0.127: IC9.11 74.3,53.98 74.3,58.74 v78.11,62.55
  Bottom 0.127: IC28.12 IC28.13 | IC27.12 IC27.13
DATA5  (via drill 0.25)
  Top 0.127: IC25.14 37.47,53.34 39.05,54.93 40.96,54.93 41.27,55.24 65.09,55.24 v65.41,55.56 | IC28.14 59.69,20.32 66.04,26.67 66.04,31.11 67.31,32.38 67.31,41.91 69.85,44.45 69.85,52.07 IC9.13 | 61.91,98.11 62.55,98.74 62.55,105.73 IC27.15 IC27.14 | 61.91,98.11 59.69,95.89 41.27,95.89 40.96,95.57 39.05,95.57 37.47,93.98 IC34.14 35.24,92.39 27.62,92.39 23.18,87.95 23.18,86.04 21.91,84.77 18.41,84.77 11.43,77.79 7.62,77.79 6.03,76.2 X1.A24 | 61.91,98.11 v63.82,96.2 | v66.04,56.52 65.09,57.47 65.09,82.23 v66.99,84.14 | v65.09,87.63 65.09,93.03 IC26.14
  Bottom 0.127: IC28.14 IC28.15 | IC9.13 66.99,54.93 66.04,54.93 v65.41,55.56 65.41,56.52 v66.04,56.52 | v63.82,96.2 IC26.14 | v66.99,84.14 66.99,87.95 65.41,87.95 v65.09,87.63
DATA6  (via drill 0.25)
  Top 0.127: IC25.17 29.84,53.34 31.75,55.24 40.01,55.24 40.64,55.88 v51.12,55.88 | IC28.16 54.61,41.27 56.2,42.86 65.09,42.86 66.04,43.81 68.58,43.81 69.53,44.77 69.53,47.31 IC9.15 | 57.47,97.79 v58.1,97.16 | 57.47,97.79 57.47,105.73 IC27.17 IC27.16 | 57.47,97.79 56.83,97.79 55.24,96.2 39.69,96.2 39.37,95.89 31.11,95.89 IC34.17 28.57,93.98 22.54,87.95 20.95,87.95 13.02,80.01 6.35,80.01 X1.A25 2.54,76.2 2.54,61.91 4.45,60.01 v4.45,59.37
  Bottom 0.127: IC28.16 IC28.17 | v51.12,55.88 52.07,54.93 61.91,54.93 IC9.15 | IC26.17 58.42,97.16 v58.1,97.16 | IC25.17 27.62,54.93 6.99,54.93 6.03,55.88 6.03,59.37 v4.45,59.37
DATA7  (via drill 0.25)
  Top 0.127: IC28.18 IC28.19 46.99,22.23 v41.91,27.3 | v29.84,29.84 29.84,30.48 27.62,32.7 27.62,42.86 25.72,44.77 25.72,52.39 IC25.18 | IC34.18 27.3,93.98 28.89,95.57 | 28.89,95.57 29.53,96.2 39.05,96.2 40.32,97.47 46.67,97.47 48.58,99.38 | IC27.18 54.61,105.41 | 54.61,105.41 48.58,99.38 | 54.61,105.41 IC27.19 | v55.24,96.84 51.12,96.84 48.58,99.38 | 28.89,95.57 23.81,95.57 23.18,94.93 23.18,93.66 19.68,90.17 18.73,90.17 11.43,82.87 7.62,82.87 6.03,81.28 X1.A26 4.45,81.28 1.27,78.11 1.27,58.1 5.08,54.29 v5.71,54.29
  Bottom 0.127: IC9.17 56.83,51.75 50.48,51.75 49.85,52.39 46.99,52.39 46.35,51.75 28.26,51.75 IC25.18 25.08,51.75 20.32,51.75 19.68,52.39 6.99,52.39 6.03,53.34 6.03,54.29 v5.71,54.29 | v41.91,27.3 41.91,29.84 v29.84,29.84 | IC26.18 55.88,96.84 v55.24,96.84
DATA8  (via drill 0.25)
  Top 0.127: v3.49,78.11 3.49,79.06 4.13,79.69 v4.13,80.33 12.06,80.33 v20.32,88.58 | IC26.2 51.75,84.77 50.16,84.77 v46.99,87.95
  Bottom 0.127: IC25.2 22.54,44.13 1.91,44.13 0.95,45.09 0.95,78.11 v3.49,78.11 | v4.13,80.33 4.13,83.82 X1.A27 | v46.99,87.95 46.35,88.58 v20.32,88.58
DATA9  (via drill 0.25)
  Top 0.127: v26.35,51.12 IC25.5 | v6.35,52.39 6.35,56.2 5.08,57.47 4.45,57.47 1.59,60.33 1.59,77.79 v3.17,79.38
  Bottom 0.127: v26.35,51.12 26.04,51.44 20,51.44 19.37,52.07 6.67,52.07 v6.35,52.39 | v3.17,79.38 3.17,86.36 X1.A28 6.03,87.31 10.79,87.31 11.43,86.68 15.24,86.68 17.14,84.77 58.74,84.77 59.69,85.72 60.33,85.72 IC26.5
DATA10  (via drill 0.25)
  Top 0.127: v39.69,48.58 42.23,48.58 v47.31,53.66 | v60.64,57.15 60.64,58.74 62.55,60.64 62.55,64.45 63.82,65.72 63.82,66.36 62.23,67.94 v62.23,83.5
  Bottom 0.127: IC25.6 37.15,48.58 v39.69,48.58 | v47.31,53.66 50.8,57.15 v60.64,57.15 | v62.23,83.5 62.23,86.36 62.87,86.36 | IC26.6 62.87,86.36 | X1.A29 6.03,87.95 18.41,87.95 18.73,87.63 20.32,87.63 20.95,88.27 46.04,88.27 46.99,87.31 49.85,87.31 50.48,87.95 61.28,87.95 62.87,86.36
DATA11  (via drill 0.25)
  Top 0.127: IC25.9 41.91,47.31 v47.62,53.02 | v66.04,57.15 66.04,59.05 67.31,60.33 67.31,79.06 71.12,82.87 IC26.9 | v43.18,90.81 44.77,90.81 48.26,87.31 49.21,87.31 v49.85,87.95
  Bottom 0.127: v47.62,53.02 51.12,56.52 64.14,56.52 64.77,57.15 v66.04,57.15 | X1.A30 6.03,92.39 17.14,92.39 17.78,93.03 20.64,93.03 22.86,90.81 v43.18,90.81 | v49.85,87.95 50.16,88.27 68.9,88.27 70.8,86.36 IC26.9
DATA12  (via drill 0.25)
  Top 0.127: IC25.12 41.91,52.7 v37.15,47.94 | IC26.12 71.12,88.27 72.07,87.31 72.07,83.19 67.63,78.74 67.63,60.01 v66.99,59.37
  Bottom 0.127: v37.15,47.94 35.24,46.04 35.24,43.18 25.08,43.18 24.45,42.55 11.11,42.55 10.16,41.59 9.53,41.59 8.57,40.64 8.57,22.86 X1.B3 | v66.99,59.37 66.67,59.05 43.81,59.05 41.91,57.15 IC25.12
DATA13  (via drill 0.25)
  Top 0.127: v34.29,48.58 IC25.15 | v24.77,43.5 19.68,43.5 12.38,36.2 12.38,28.57 10.16,26.35 8.57,26.35 X1.B4 | IC26.15 63.5,90.81 60.01,87.31 v60.01,85.09 | v60.01,83.5 58.74,83.5 57.15,81.92 v57.15,69.85 | v41.27,66.67 41.27,64.77 38.1,61.59 v38.1,58.1
  Bottom 0.127: v34.29,48.58 32.7,46.99 32.7,43.5 v24.77,43.5 | v60.01,83.5 v60.01,85.09 | v57.15,69.85 56.83,70.17 44.13,70.17 42.86,68.9 42.86,66.67 v41.27,66.67 | v38.1,58.1 34.29,54.29 IC25.15
DATA14  (via drill 0.25)
  Top 0.127: v20,45.09 12.06,37.15 12.06,30.8 10.16,28.89 8.57,28.89 X1.B5 | v42.23,77.15 42.23,75.88 40.32,73.98 40.32,64.45 37.78,61.91 37.78,59.37 v37.15,58.74
  Route2 0.127: IC25.16 30.48,52.07 30.48,51.12 29.84,50.48 24.45,50.48 20,46.04 v20,45.09
  Route15 0.127: IC26.16 60.33,93.34 60.33,92.71 58.74,91.12 56.83,91.12 42.86,77.15 v42.23,77.15
  Bottom 0.127: IC25.16 v37.15,58.74
DATA15  (via drill 0.25)
  Top 0.127: IC25.19 24.13,48.26 23.18,47.31 21.27,47.31 11.75,37.78 11.75,32.38 10.79,31.43 8.57,31.43 X1.B6 | IC26.19 53.34,88.27 52.07,87 v52.07,85.72
  Route15 0.127: v52.07,85.72 40.32,73.98 40.32,70.8 24.77,55.24 24.77,53.98 IC25.19
DEST-ADDR
  Top 0.127: IC37.1 110.17,4.13 136.53,4.13 136.84,4.45 138.11,4.45 140.02,6.35 140.02,14.29 IC13.19
DO-HALT  (via drill 0.25)